# Altium PCB PC110.PcbDoc (part 1 of 24)
Units mm, origin at the board's own origin, x right, y up, seen from the top; angles counter-clockwise.
Board outline 150.05 x 107.35 mm, 10 copper layers (In2.Cu, F.Cu, B.Cu, In1.Cu, In3.Cu, In4.Cu, In5.Cu, In6.Cu, In7.Cu, In8.Cu); 936 components, 1434 nets, 4891 pads, 6088 vias.
Unrouted connection lines stored in the file: 2995.
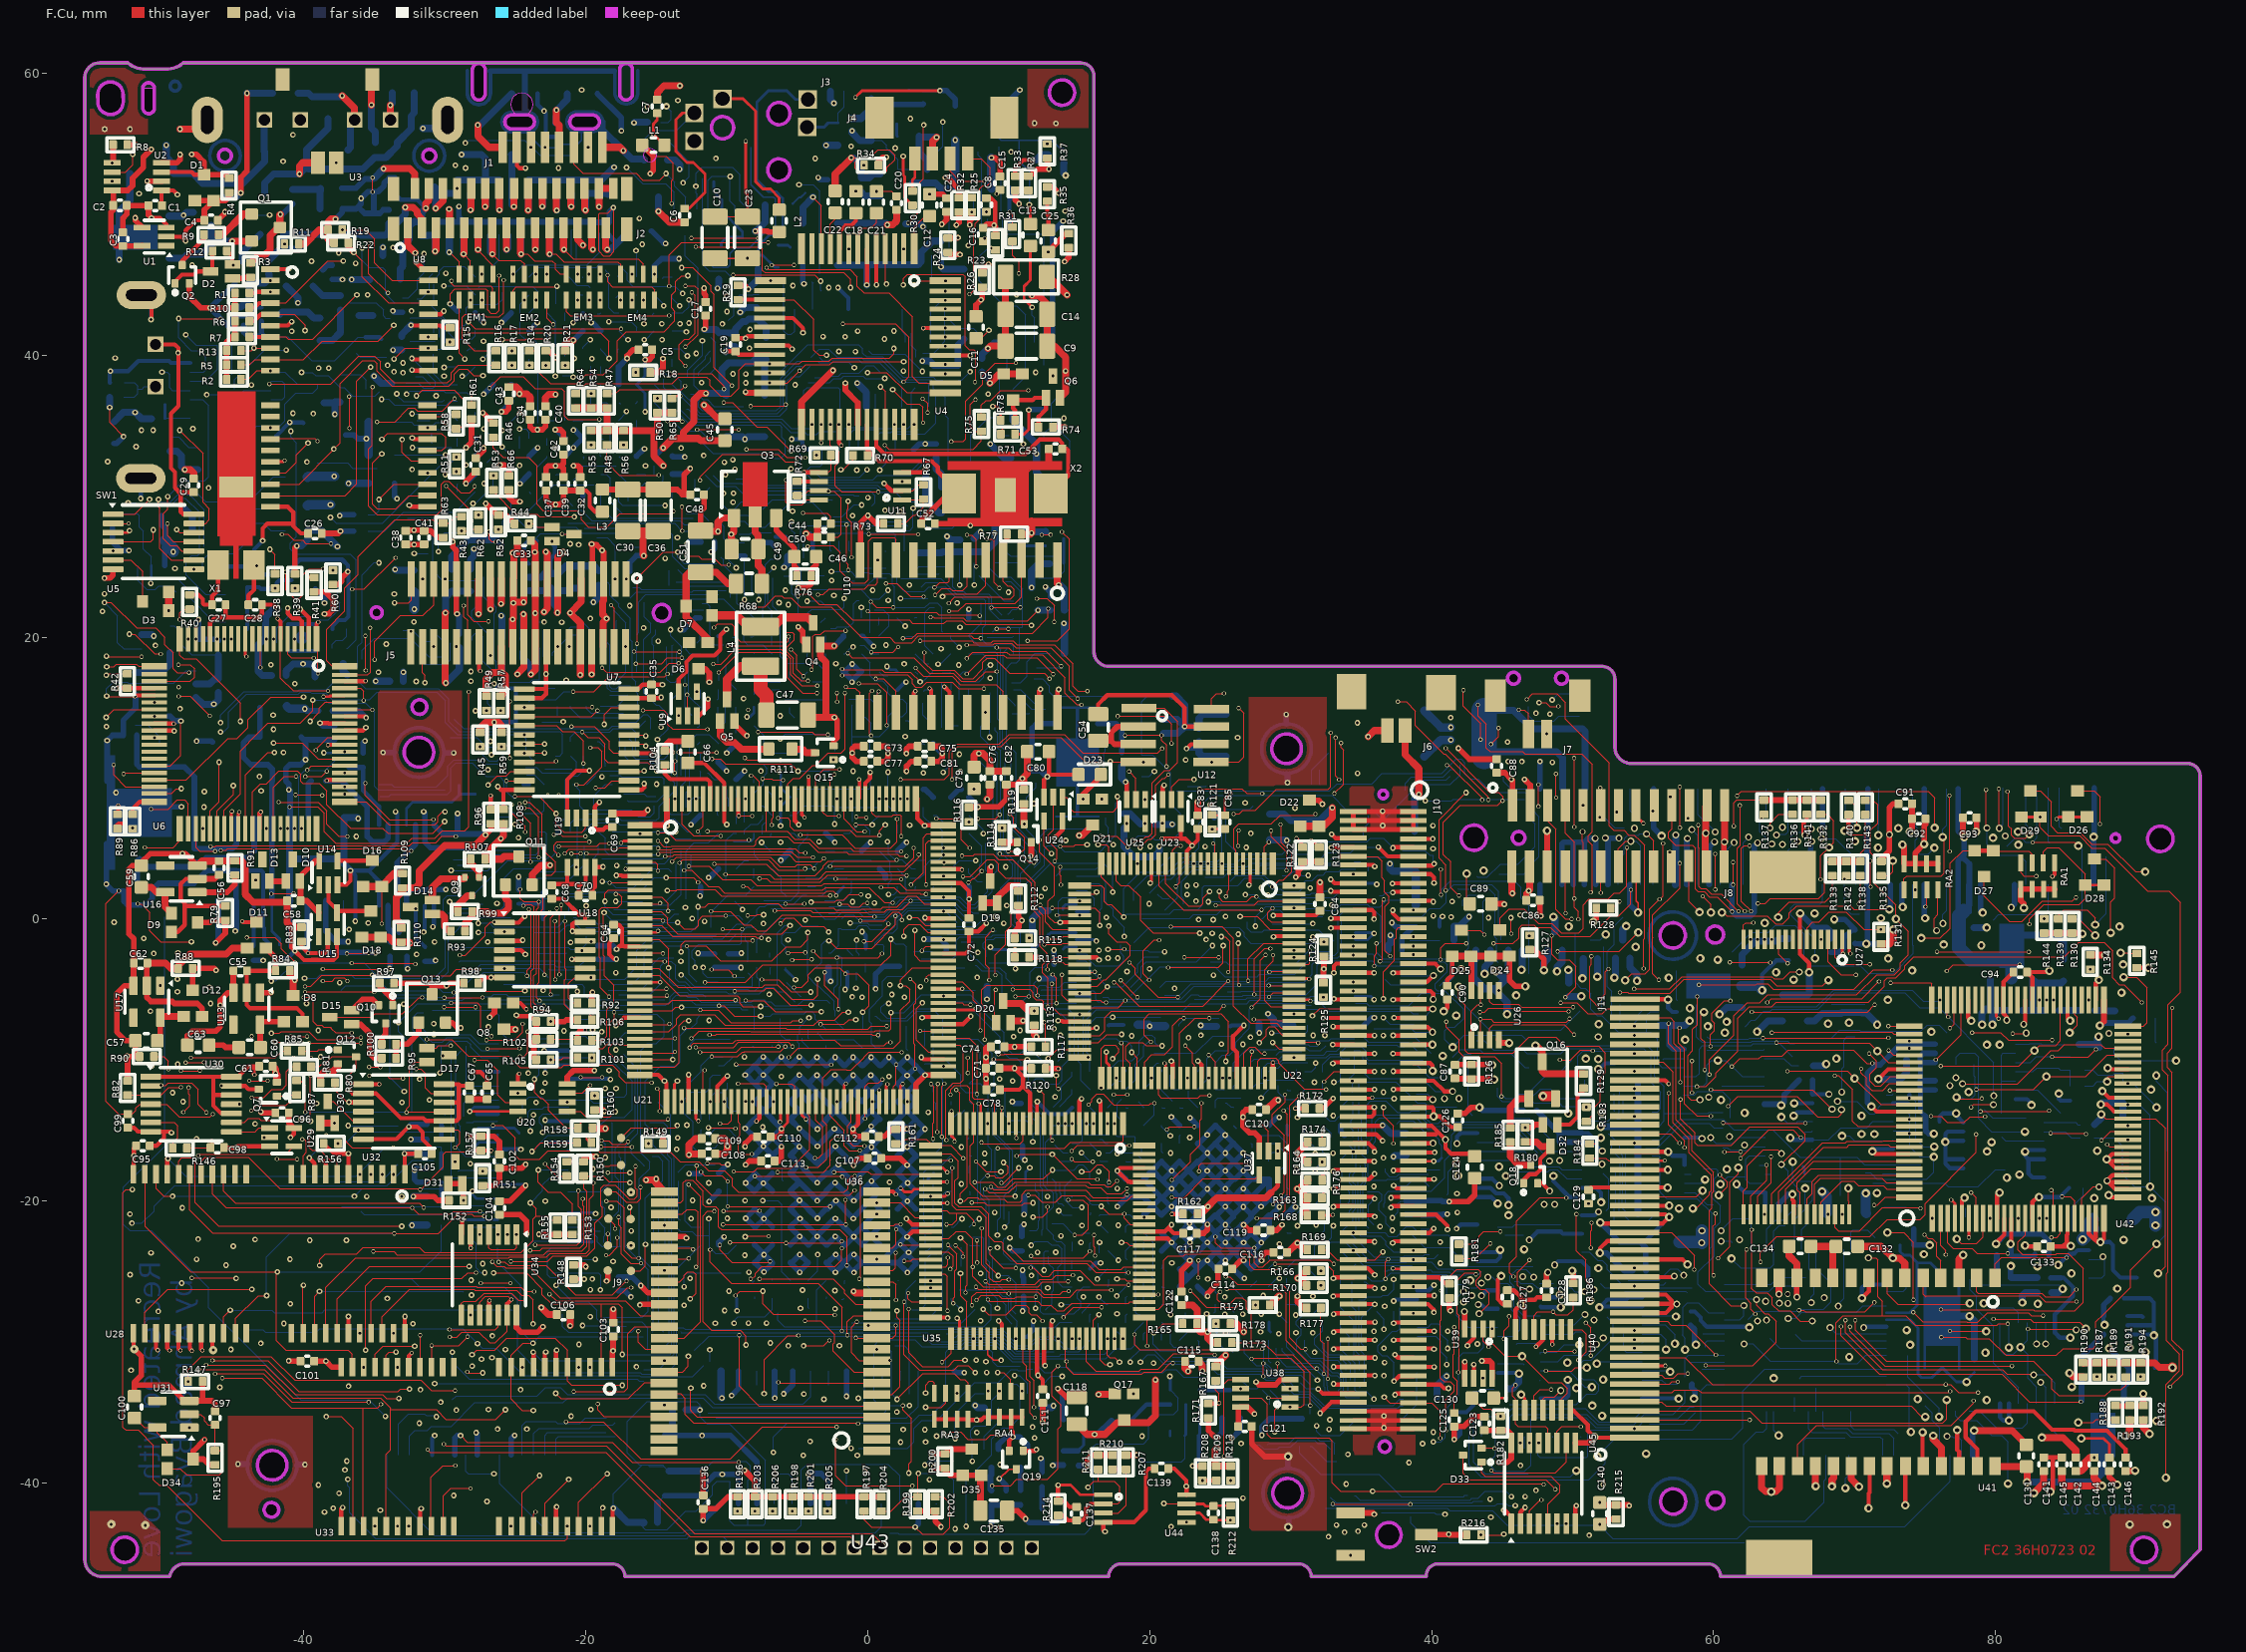
[diagram p0: F.Cu view]
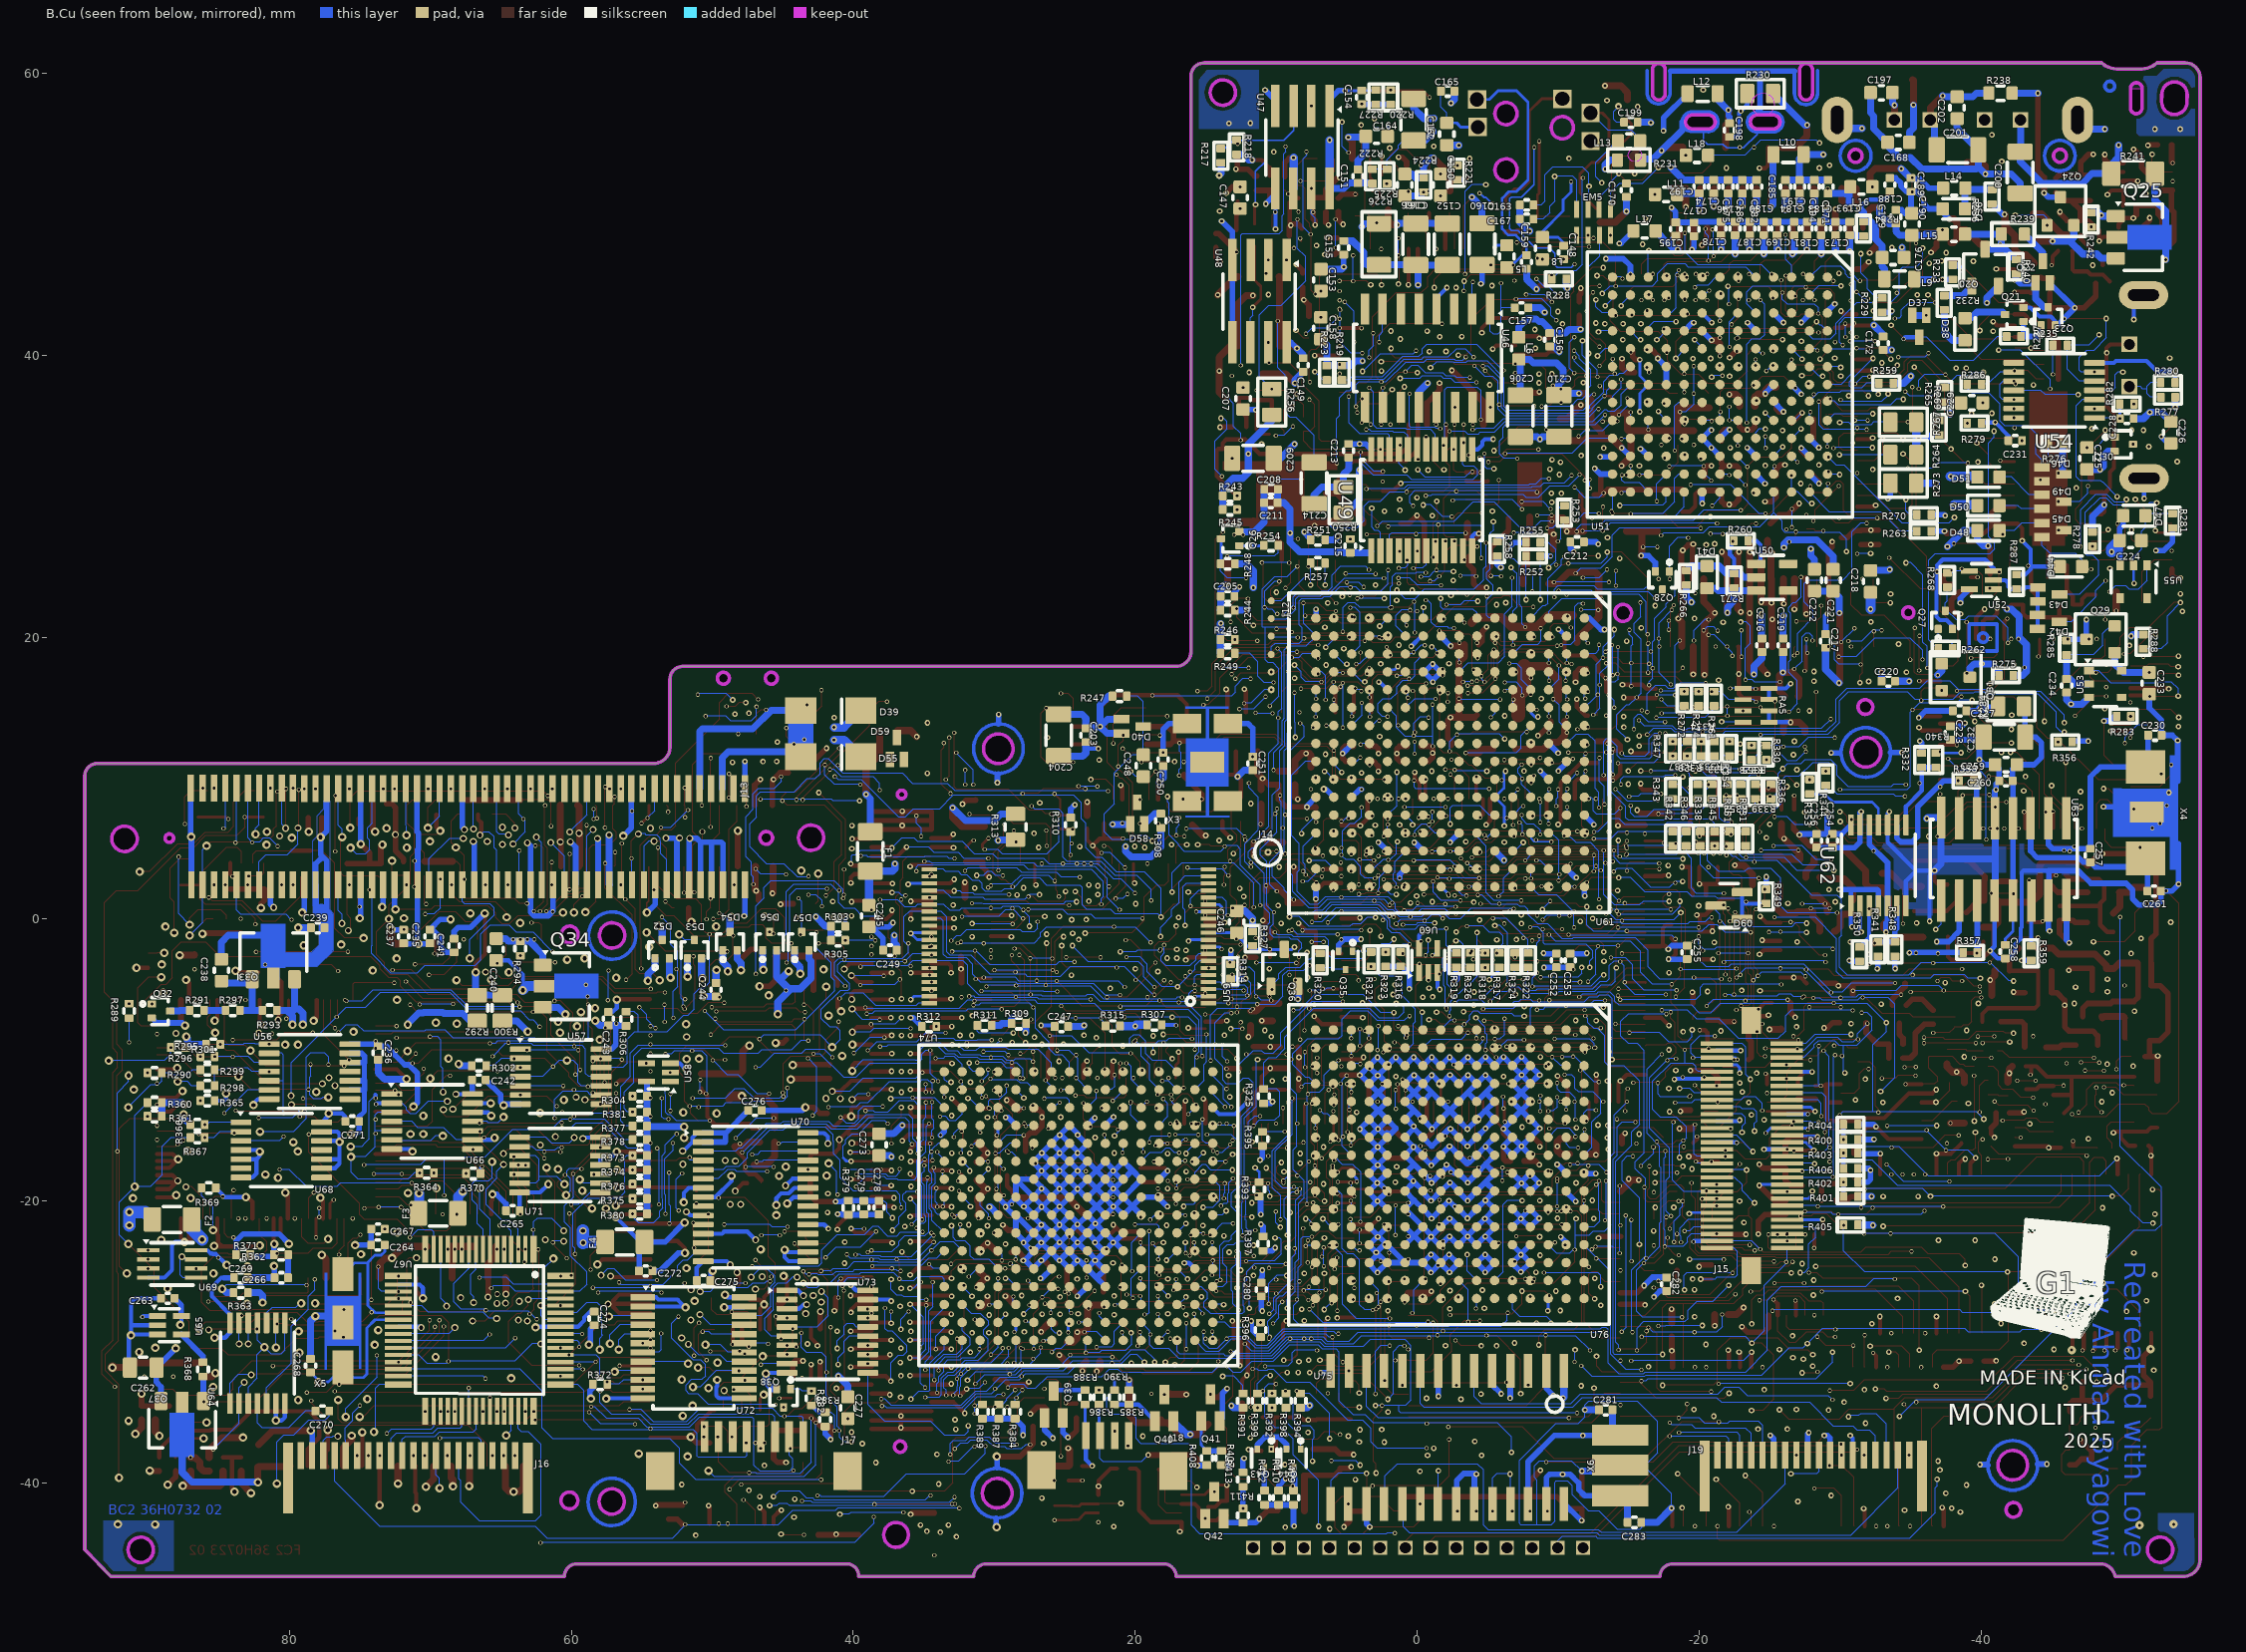
[diagram p1: B.Cu view, seen from below]
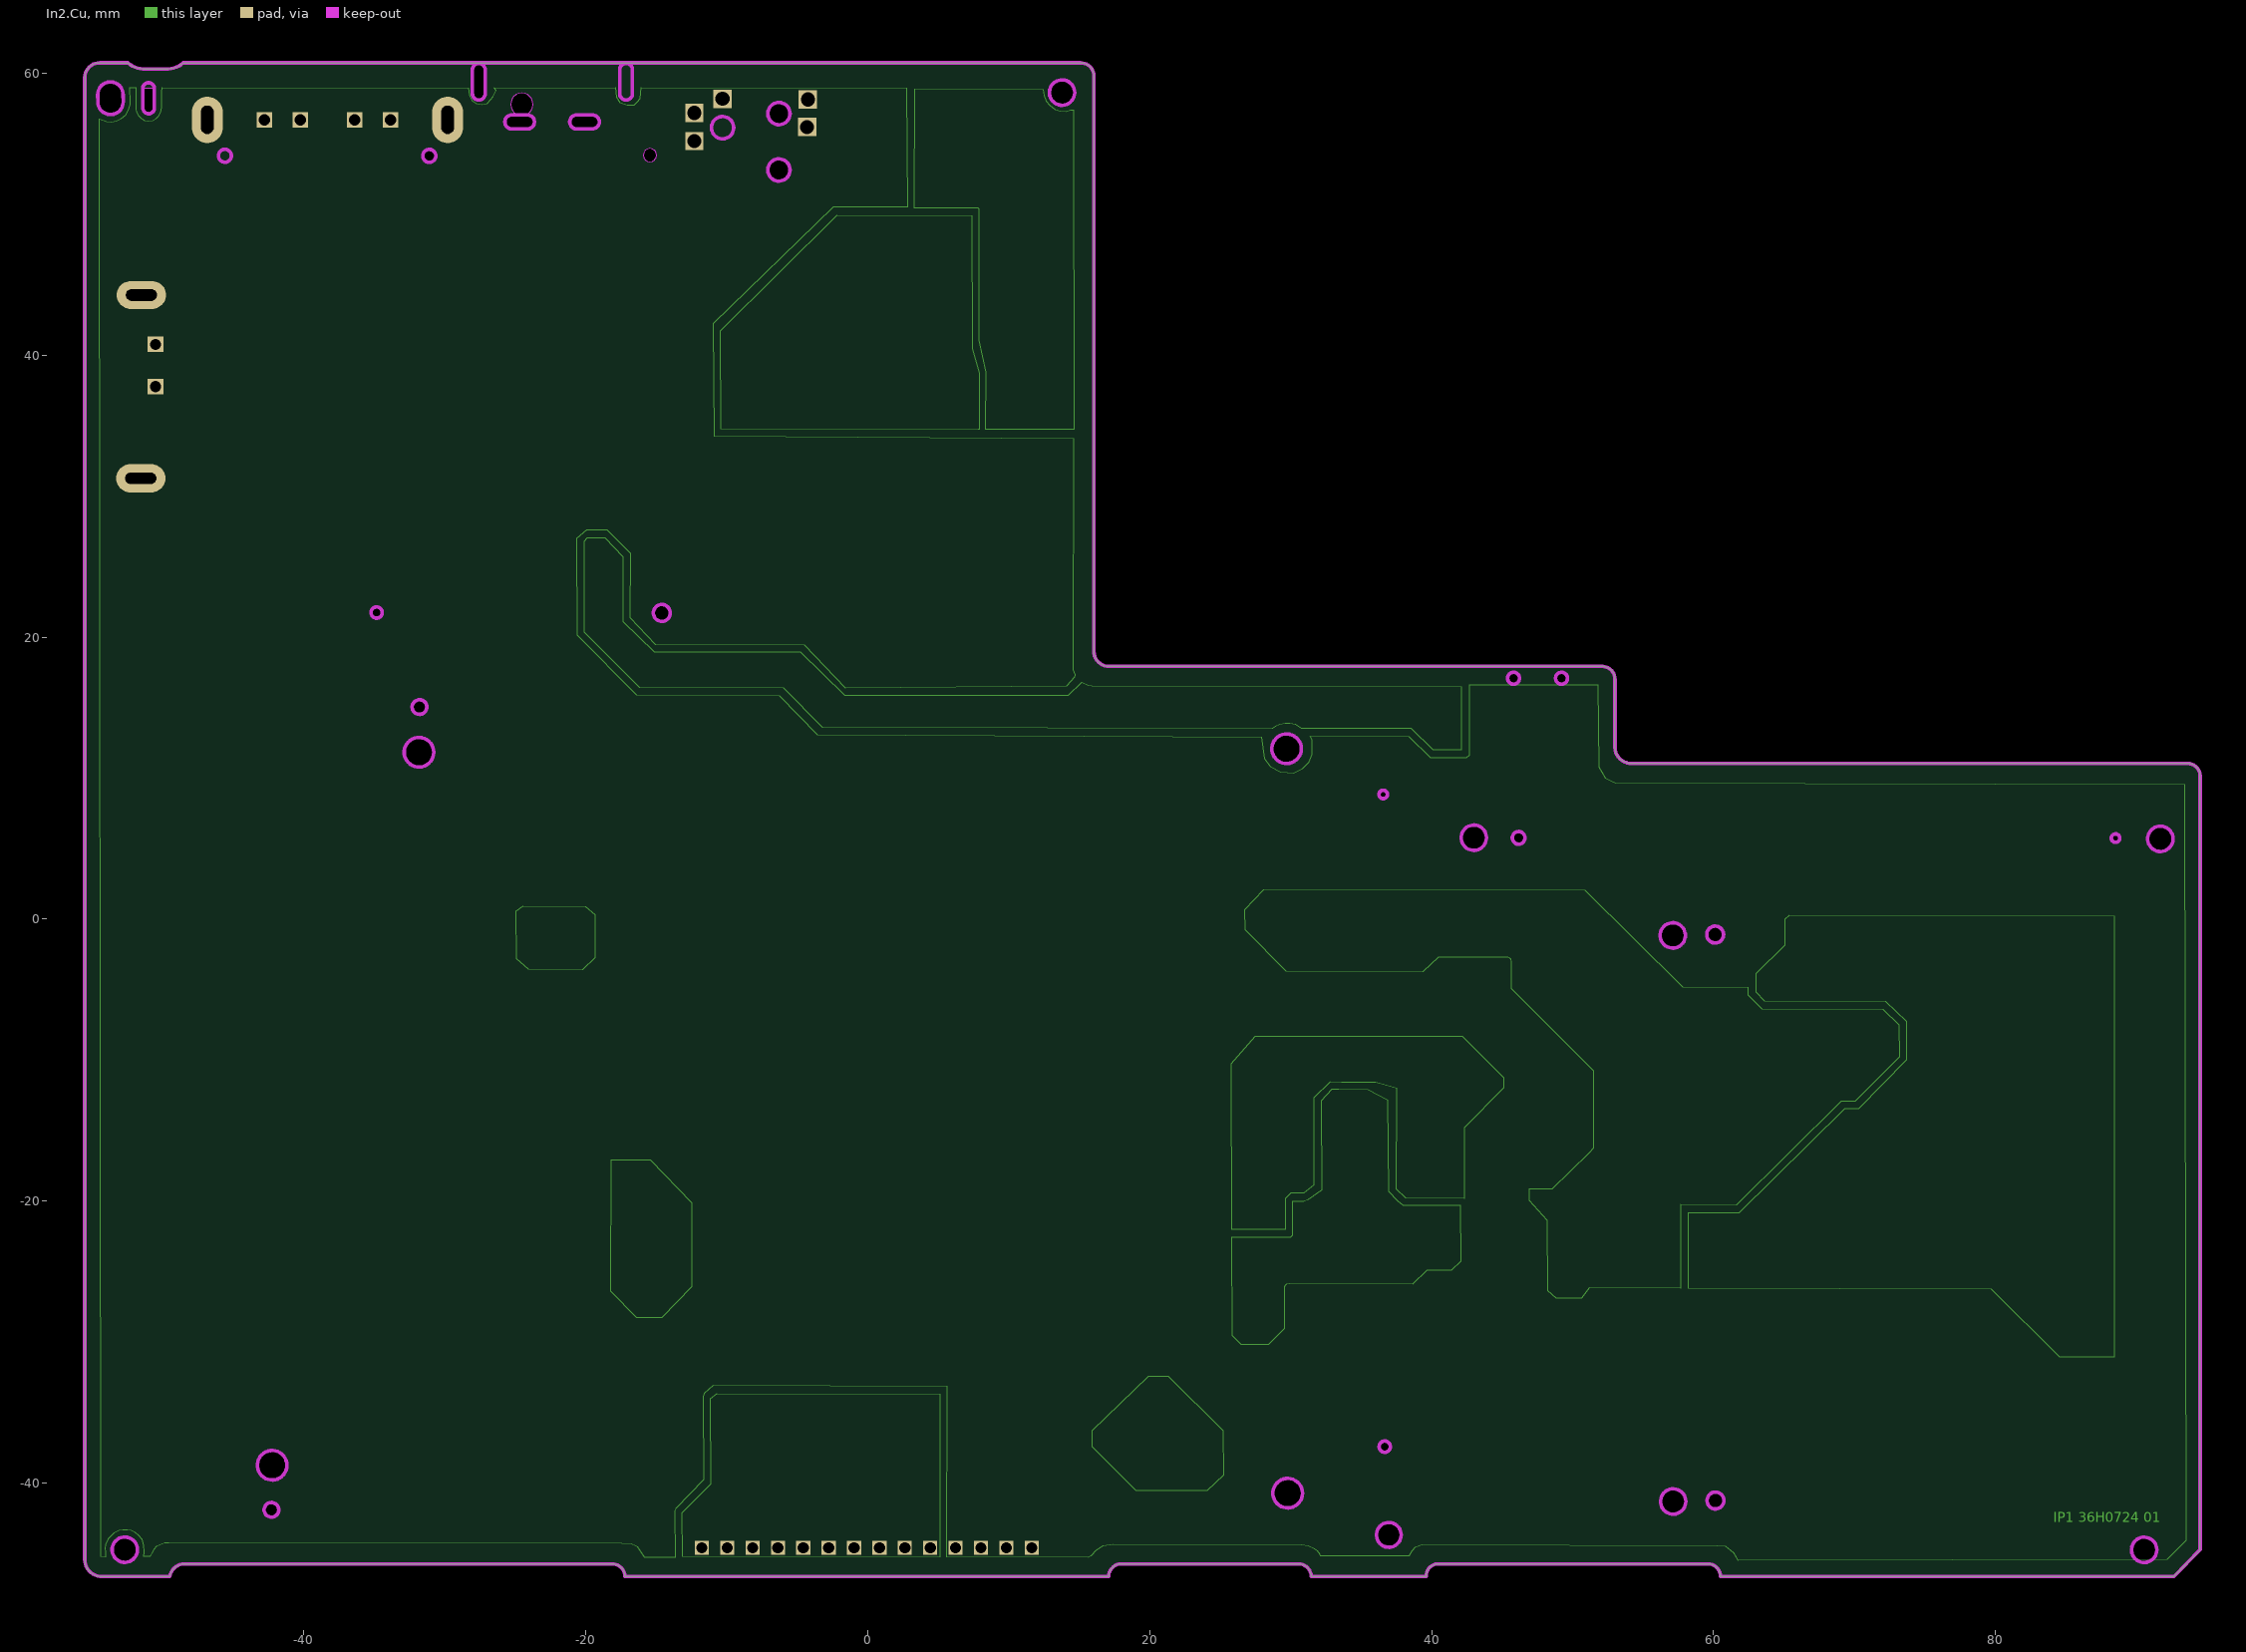
[diagram p2: In2.Cu]
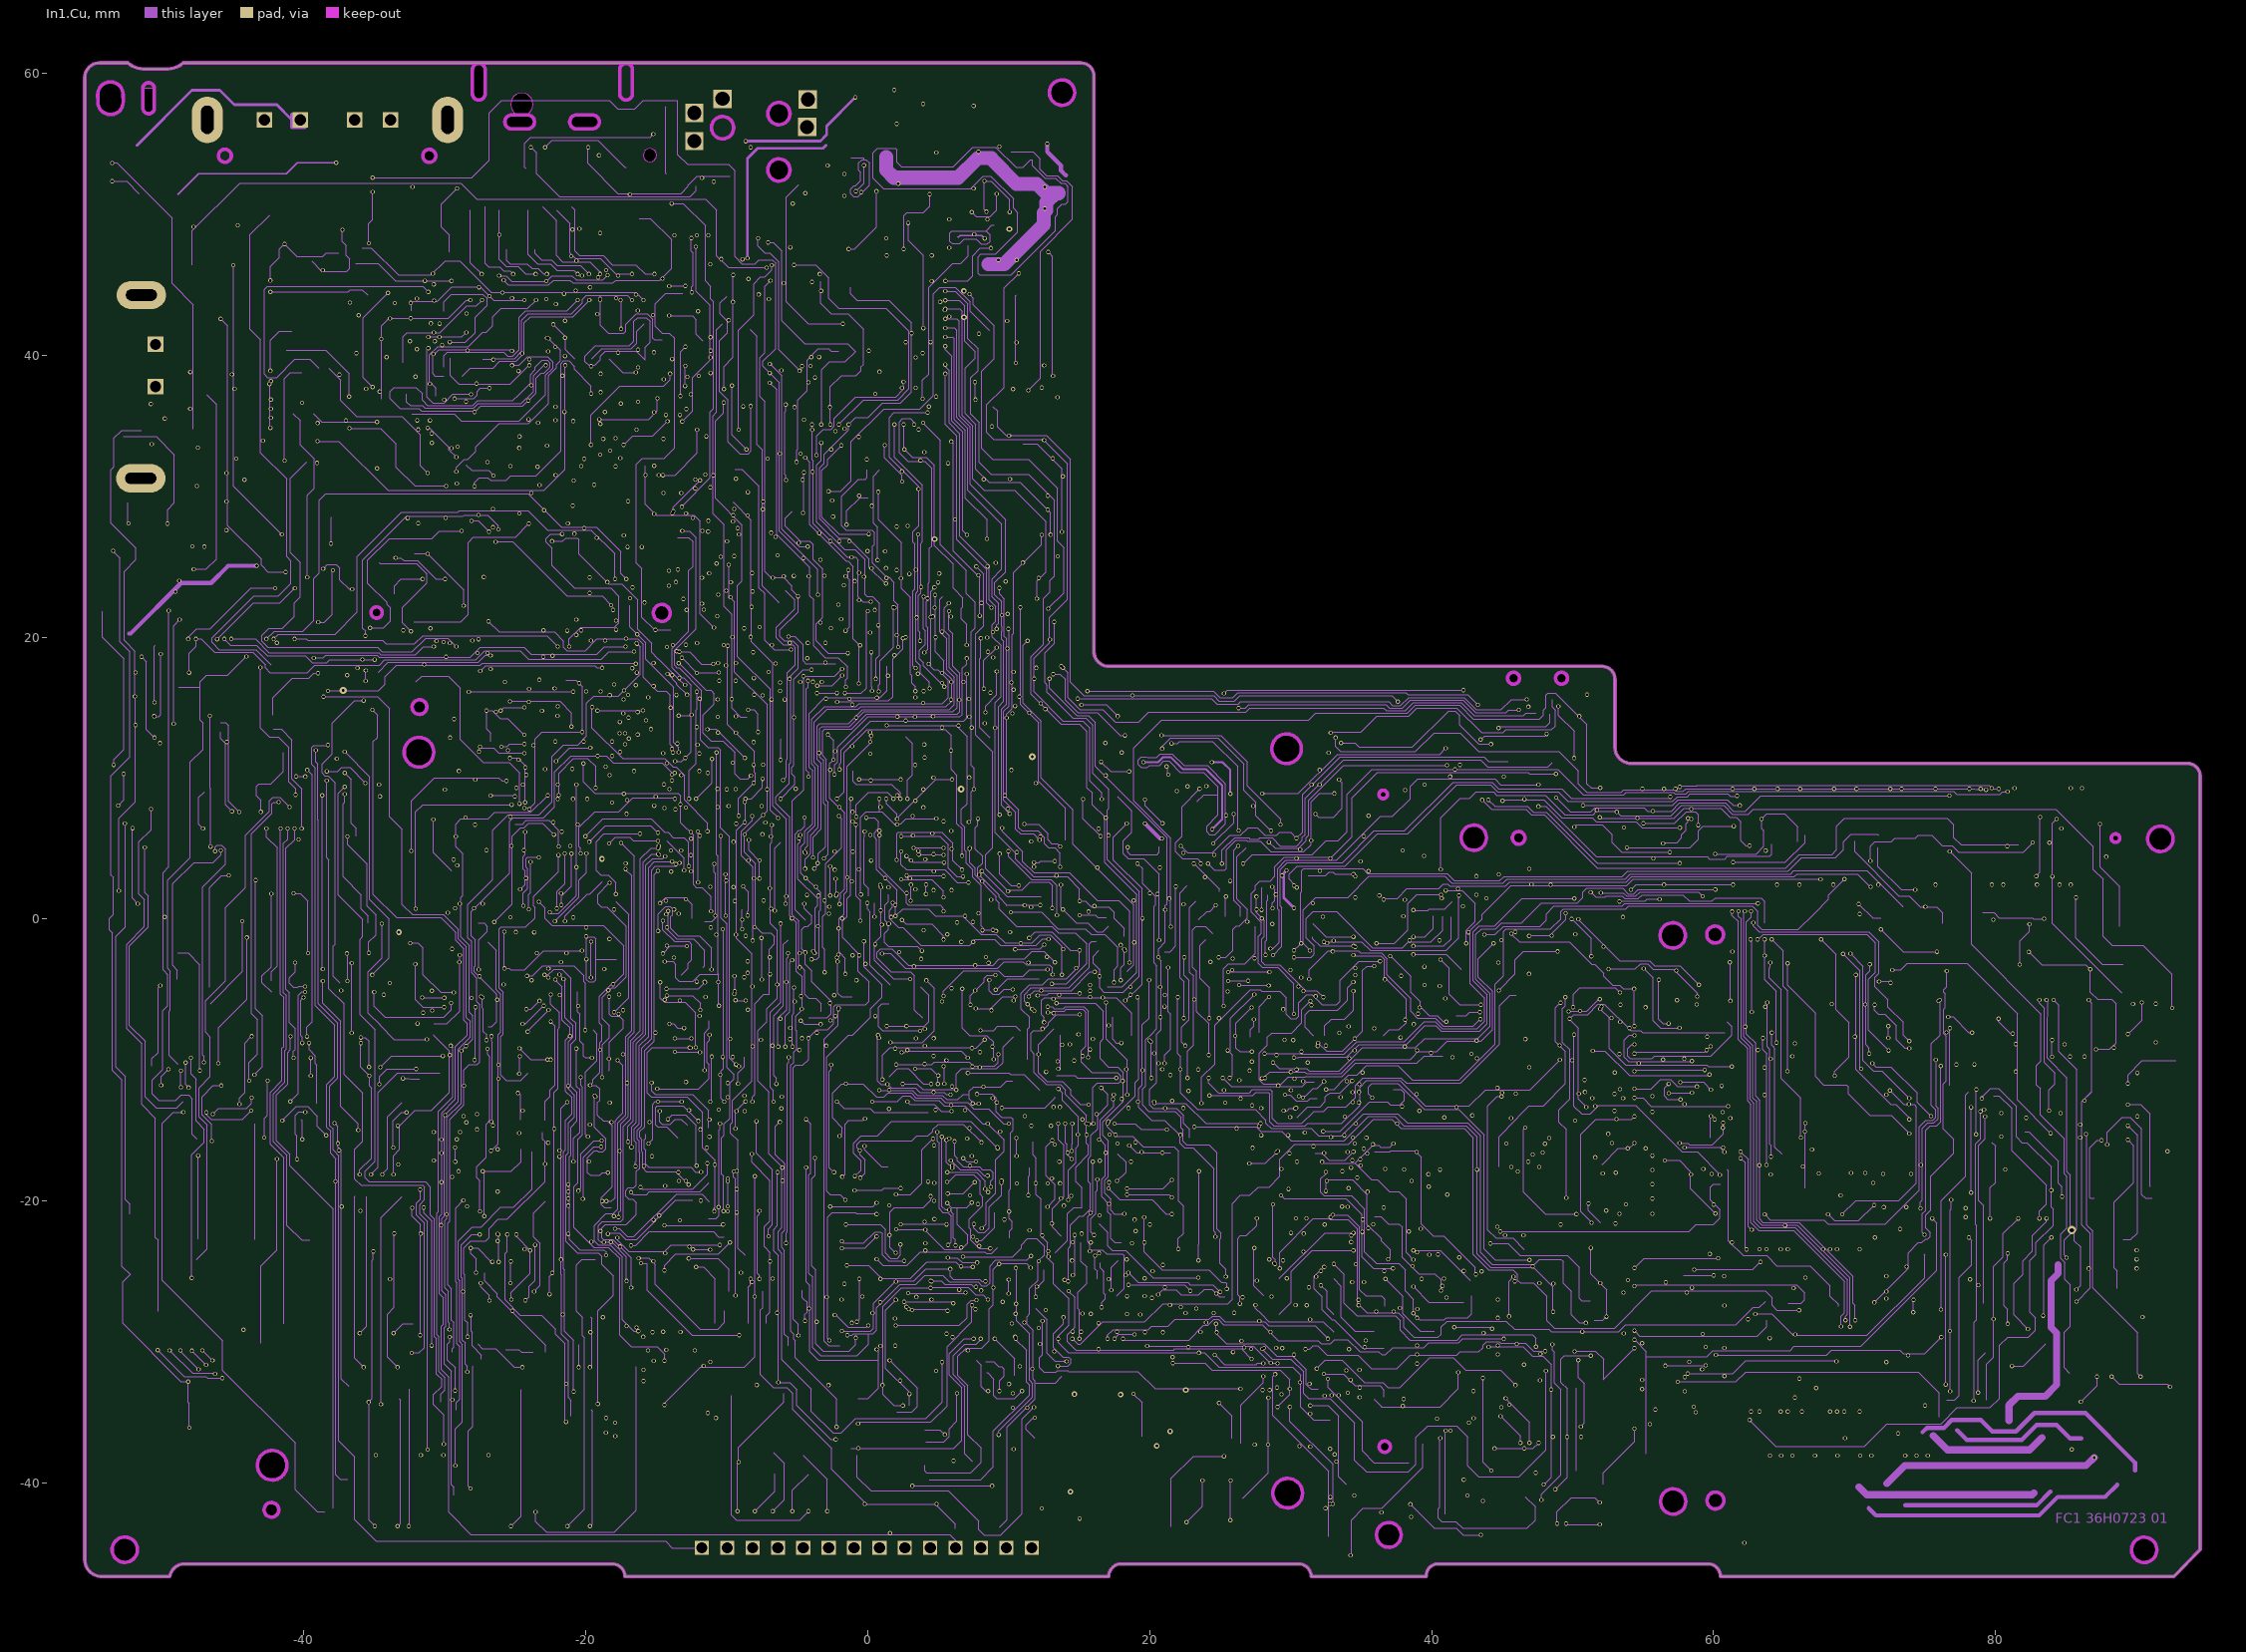
[diagram p3: In1.Cu]
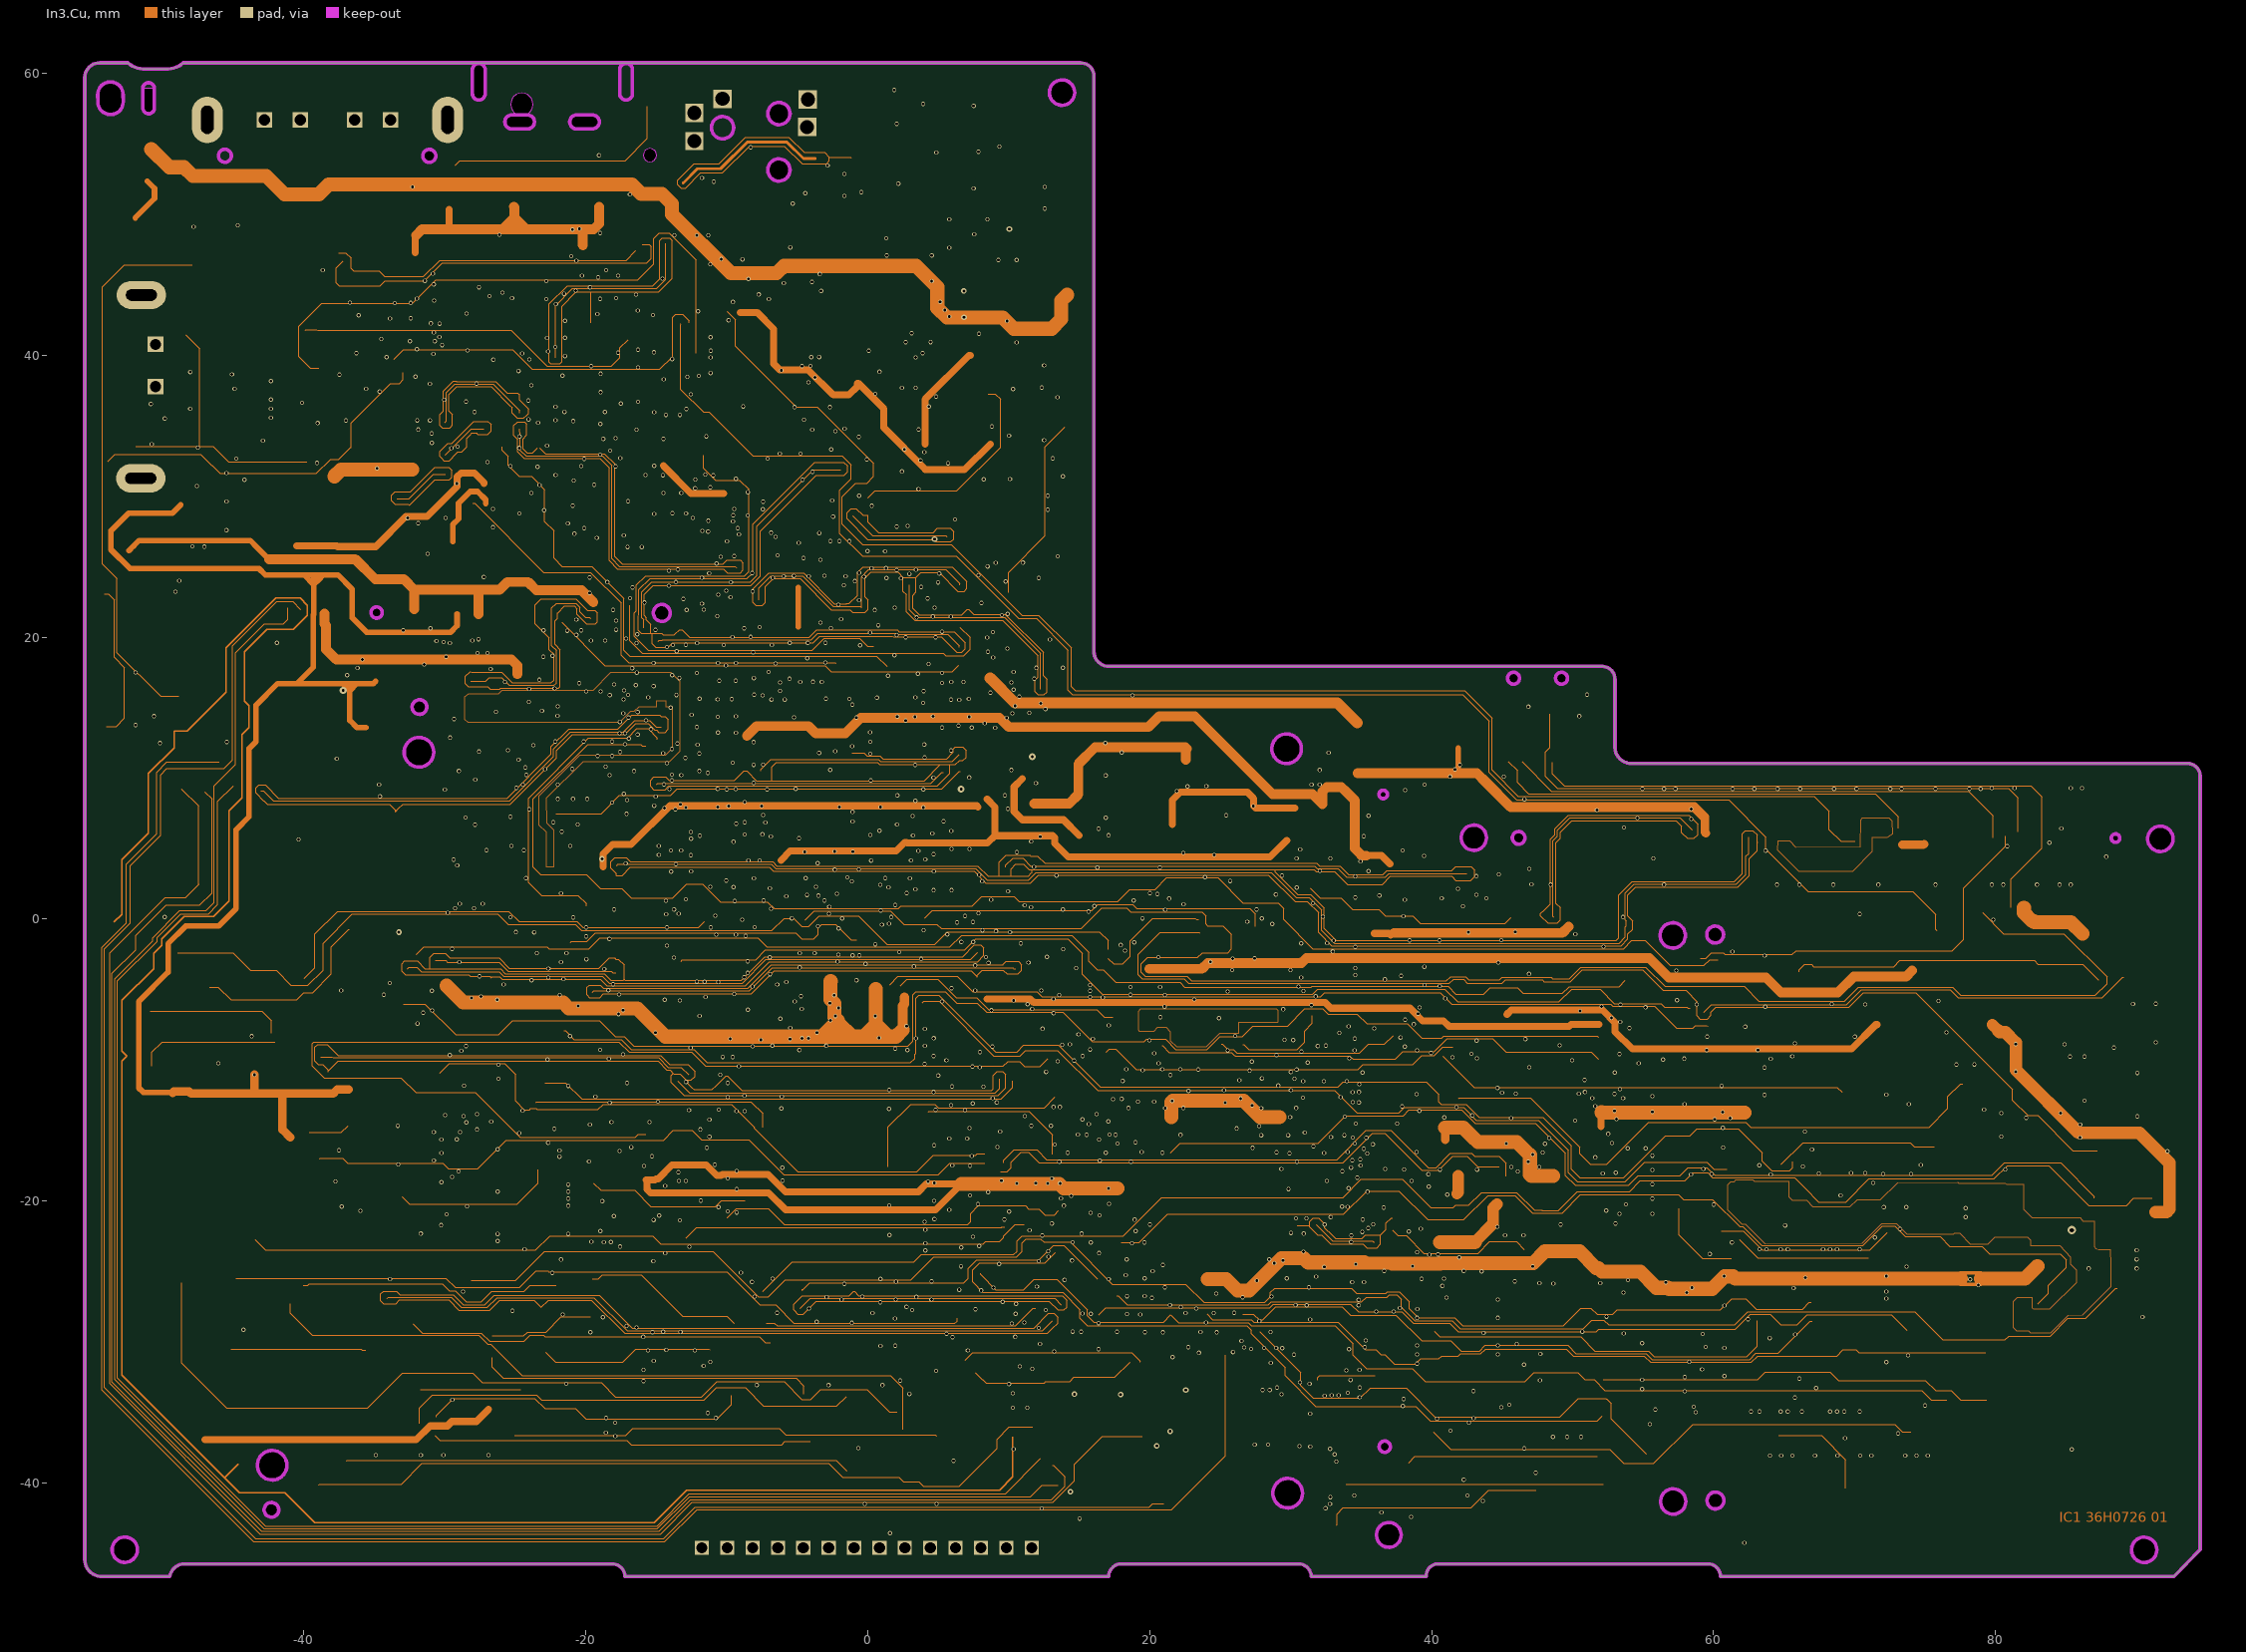
[diagram p4: In3.Cu]
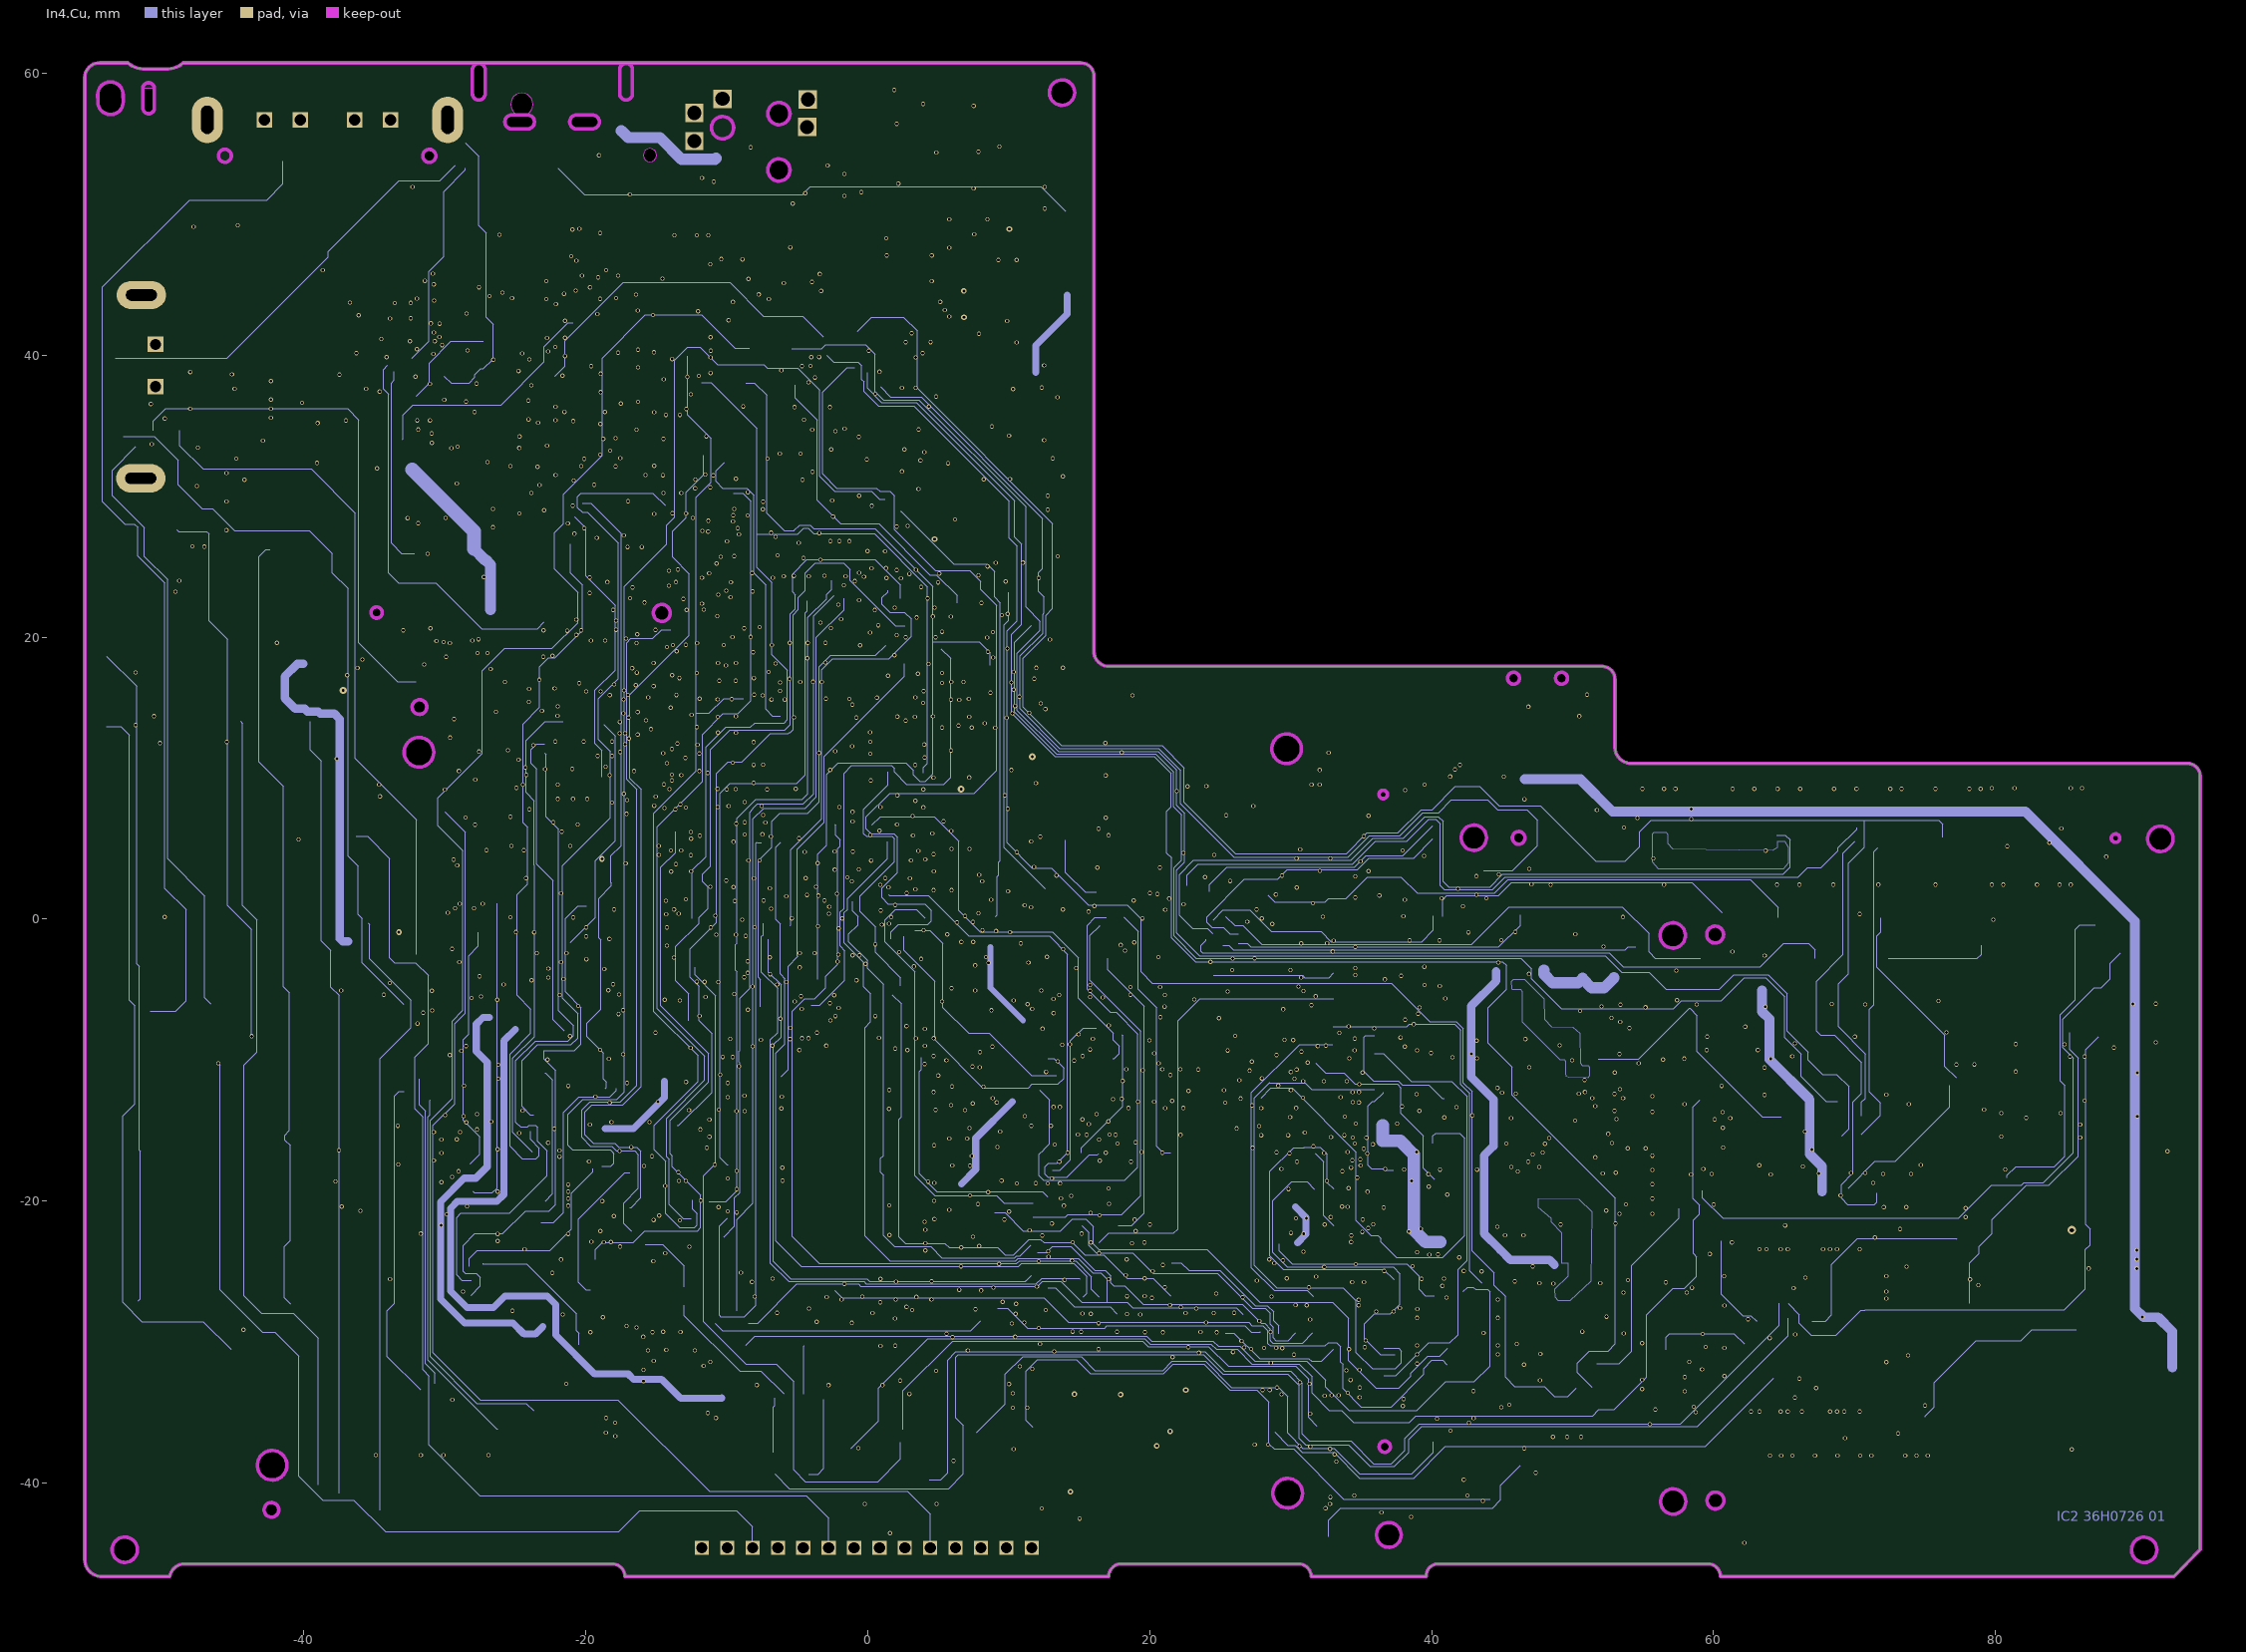
[diagram p5: In4.Cu]
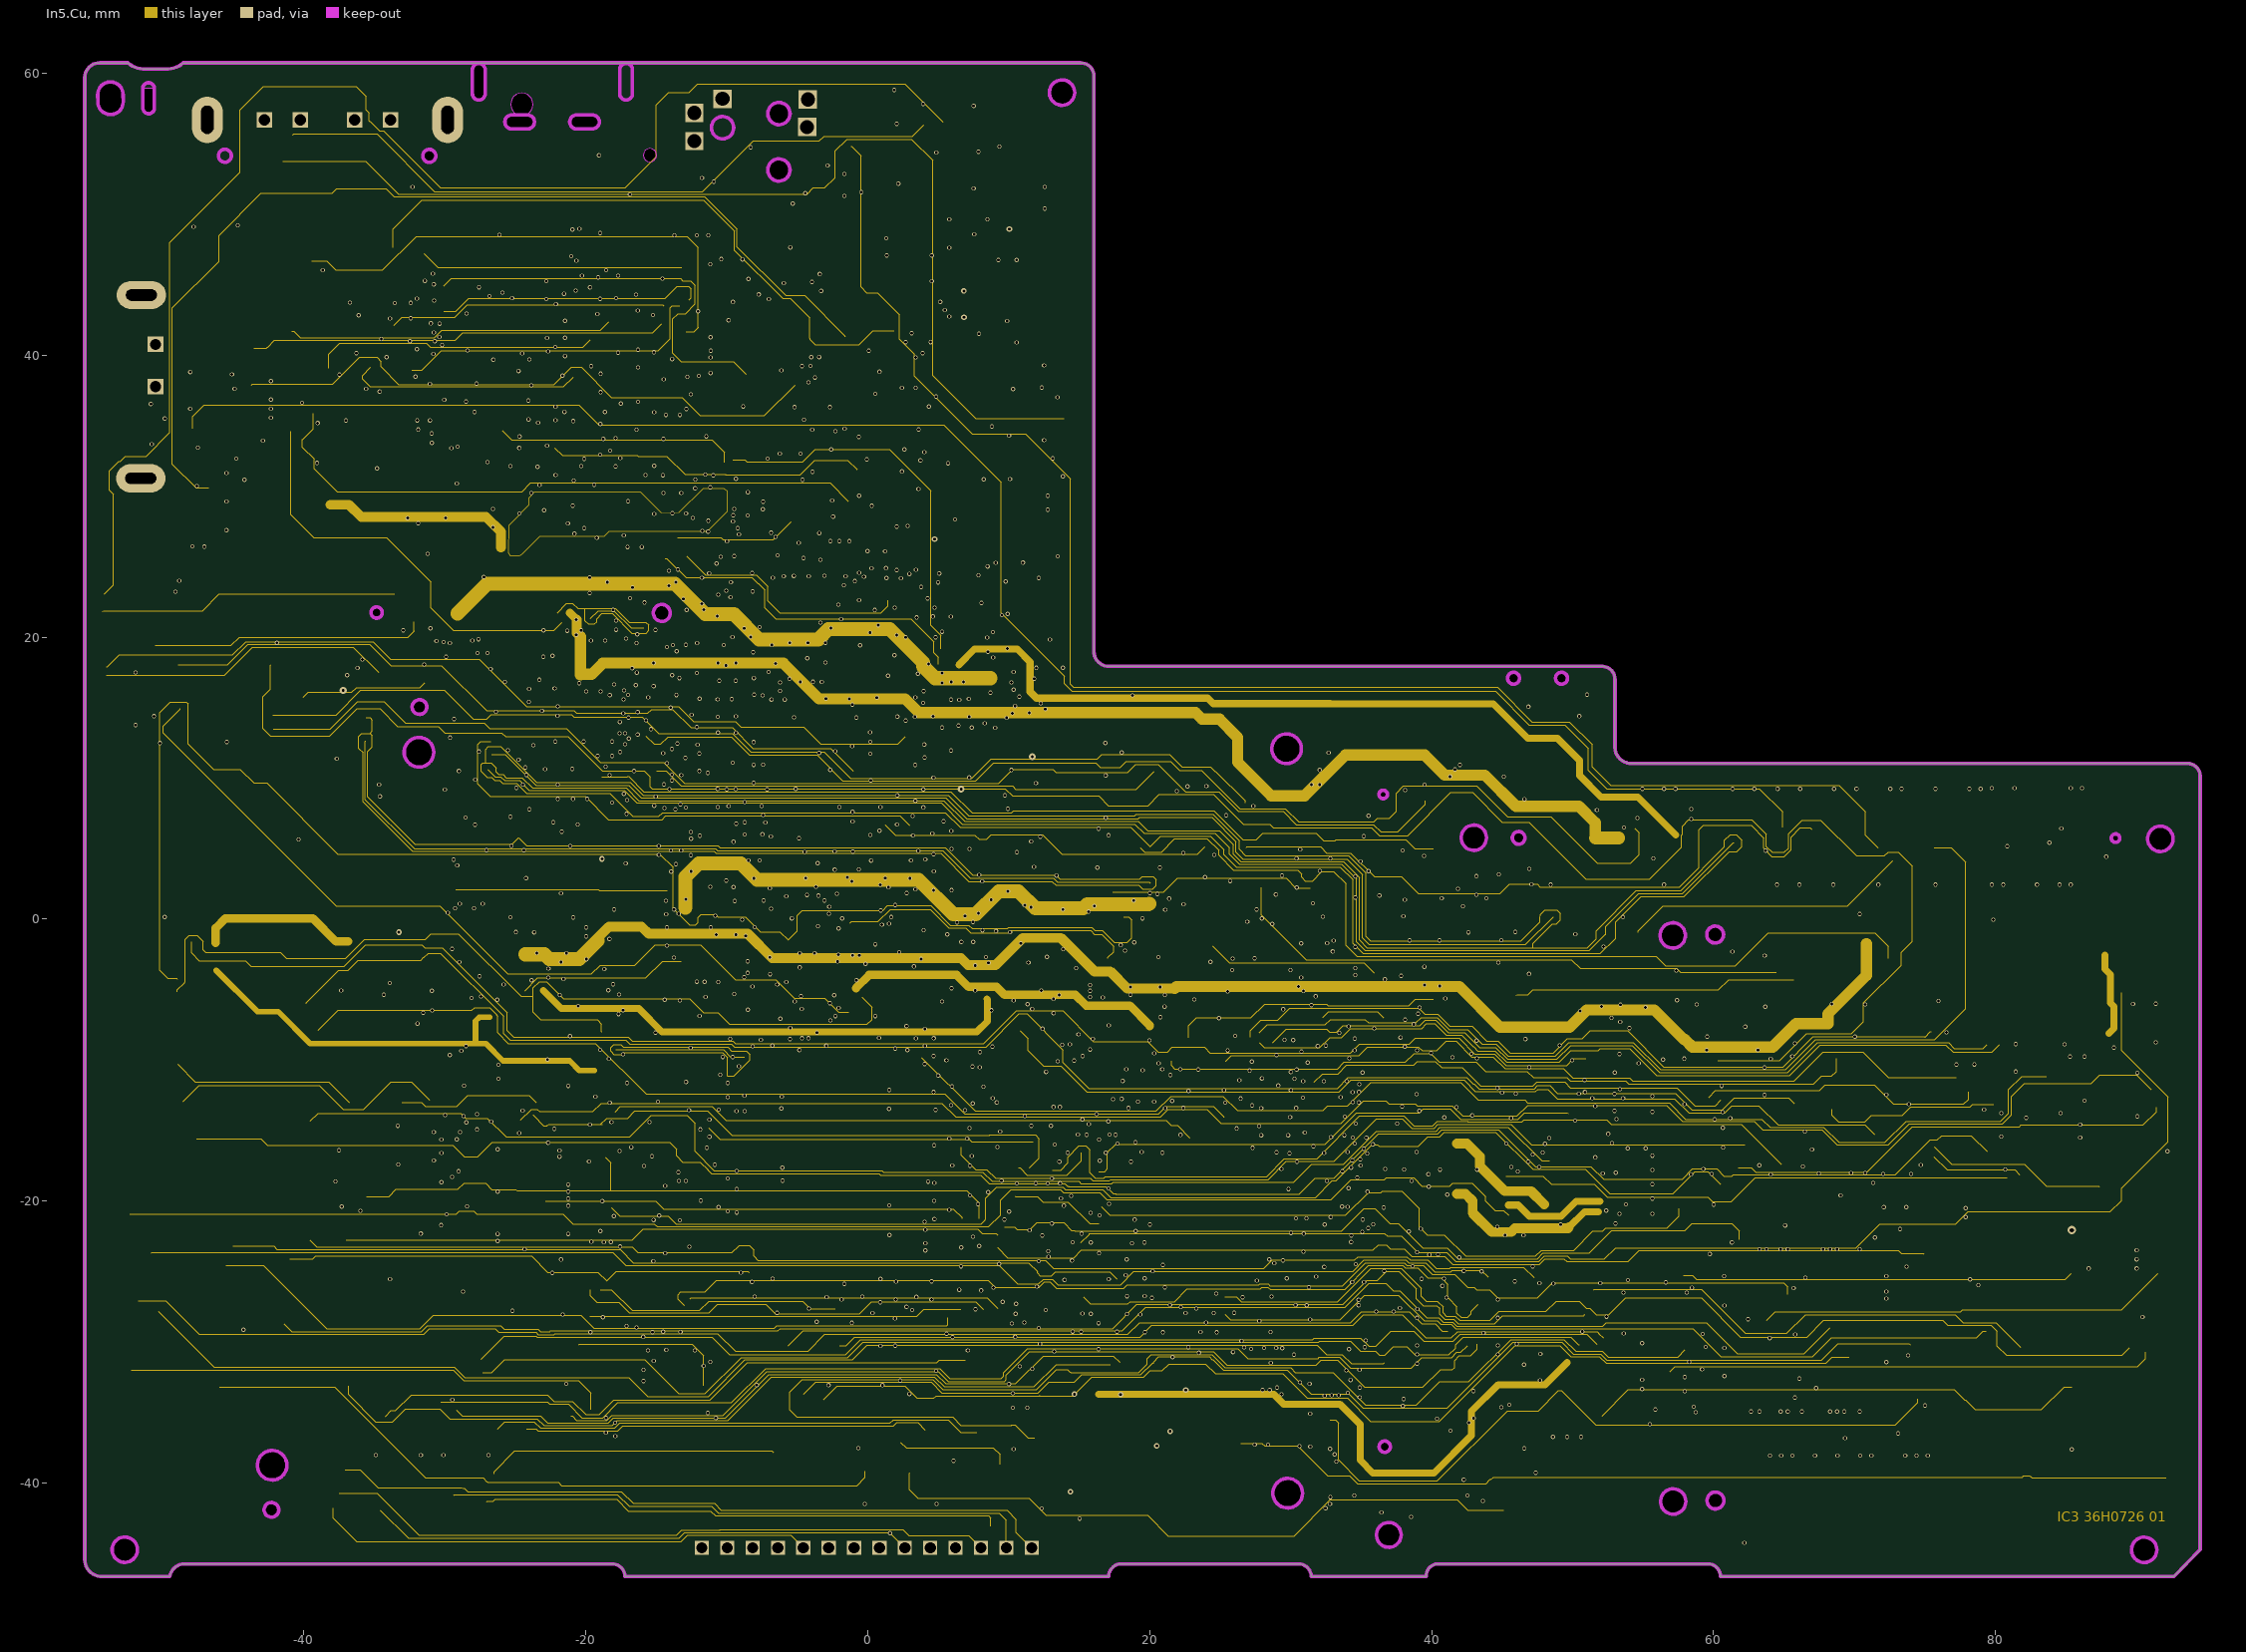
[diagram p6: In5.Cu]
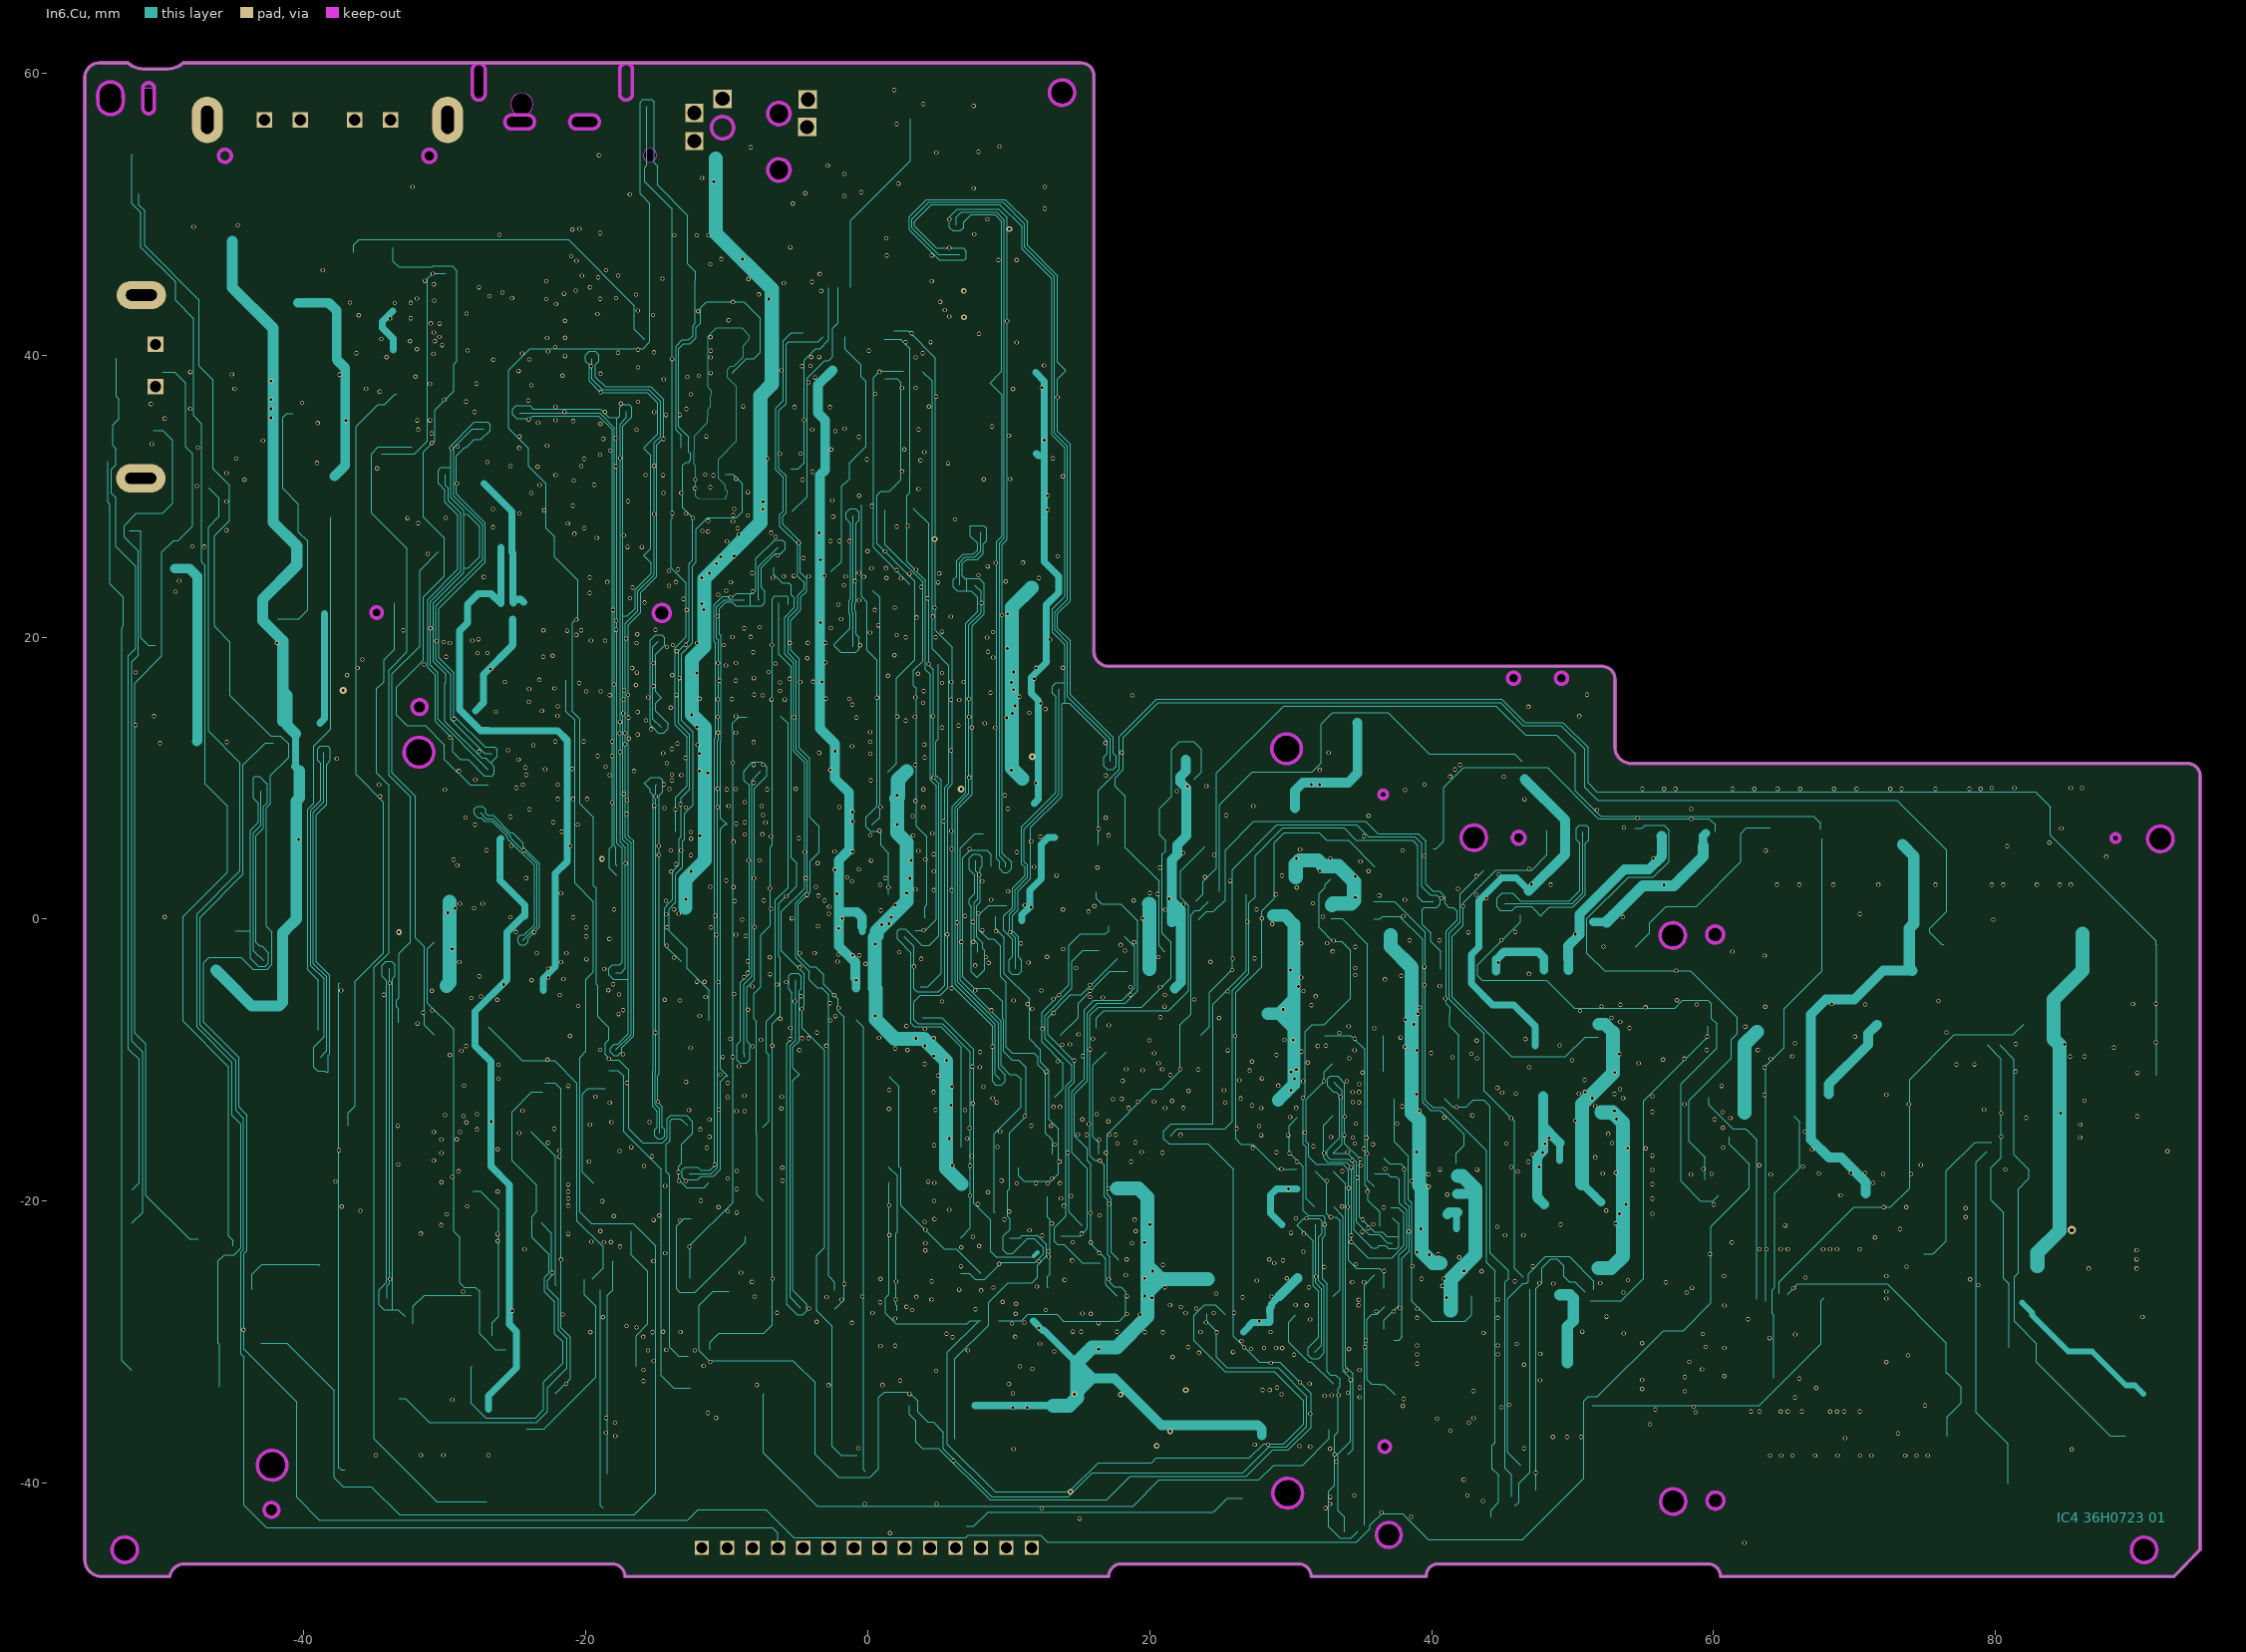
[diagram p7: In6.Cu]
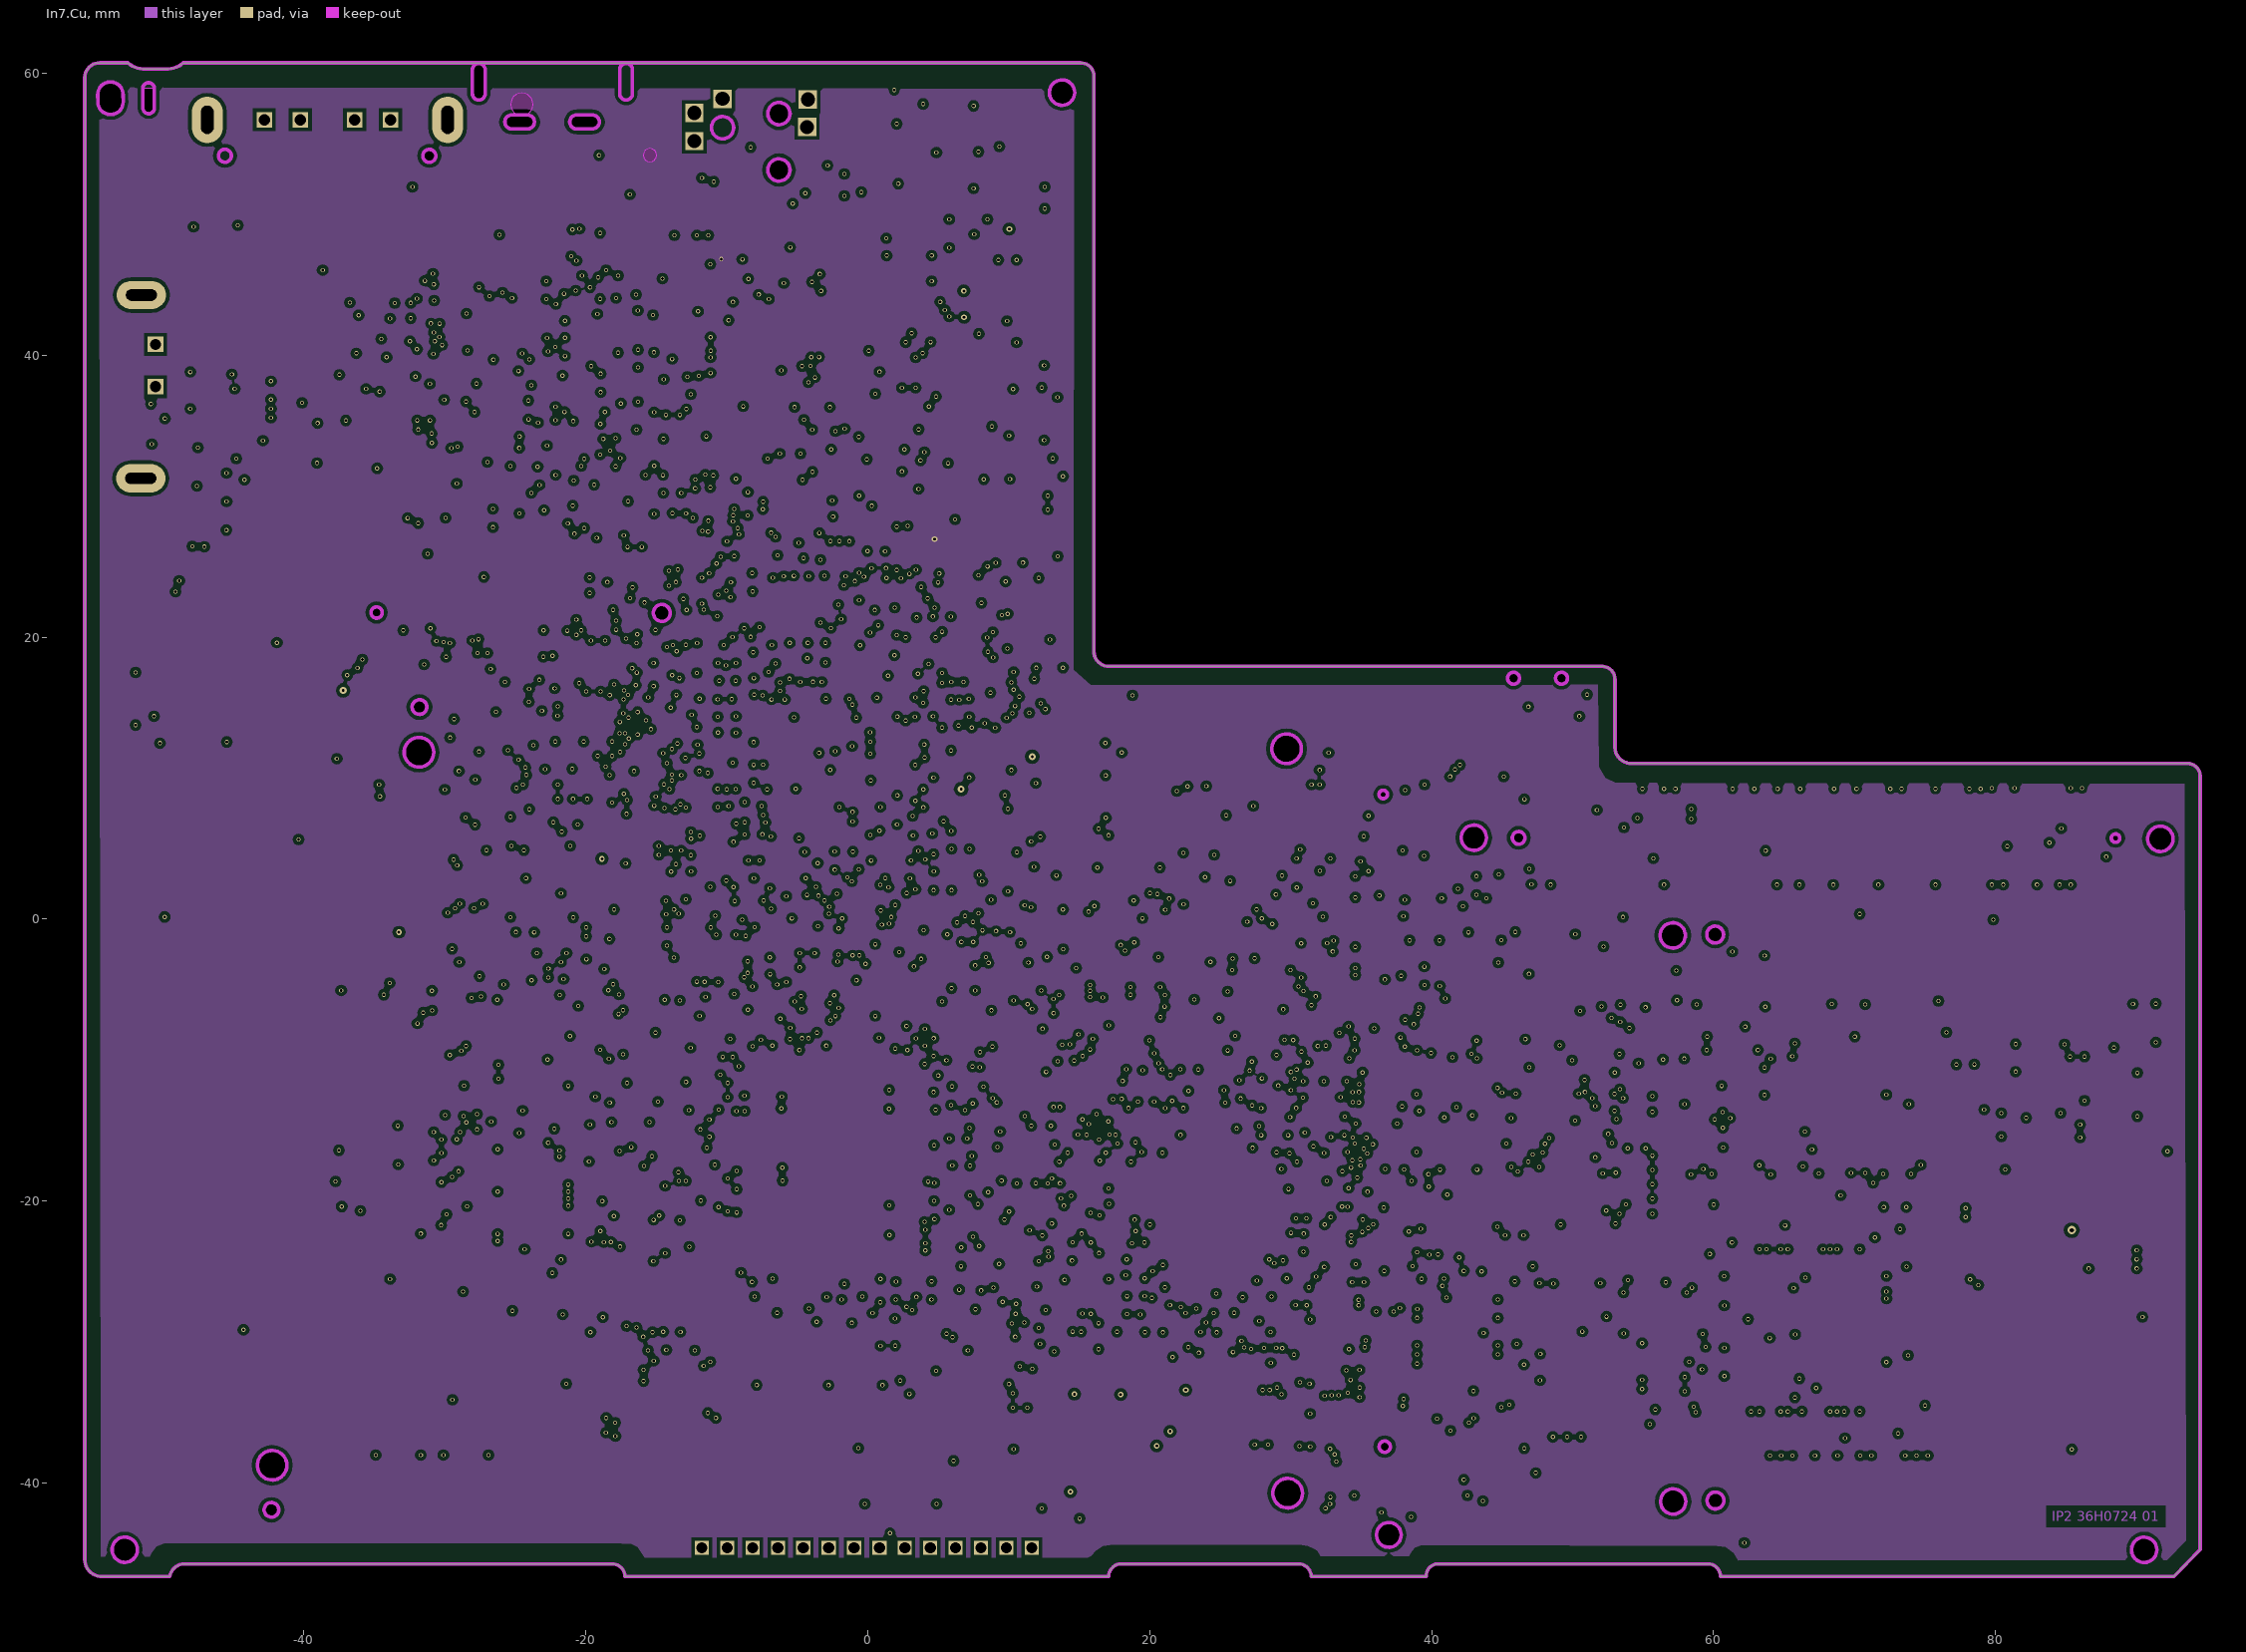
[diagram p8: In7.Cu]
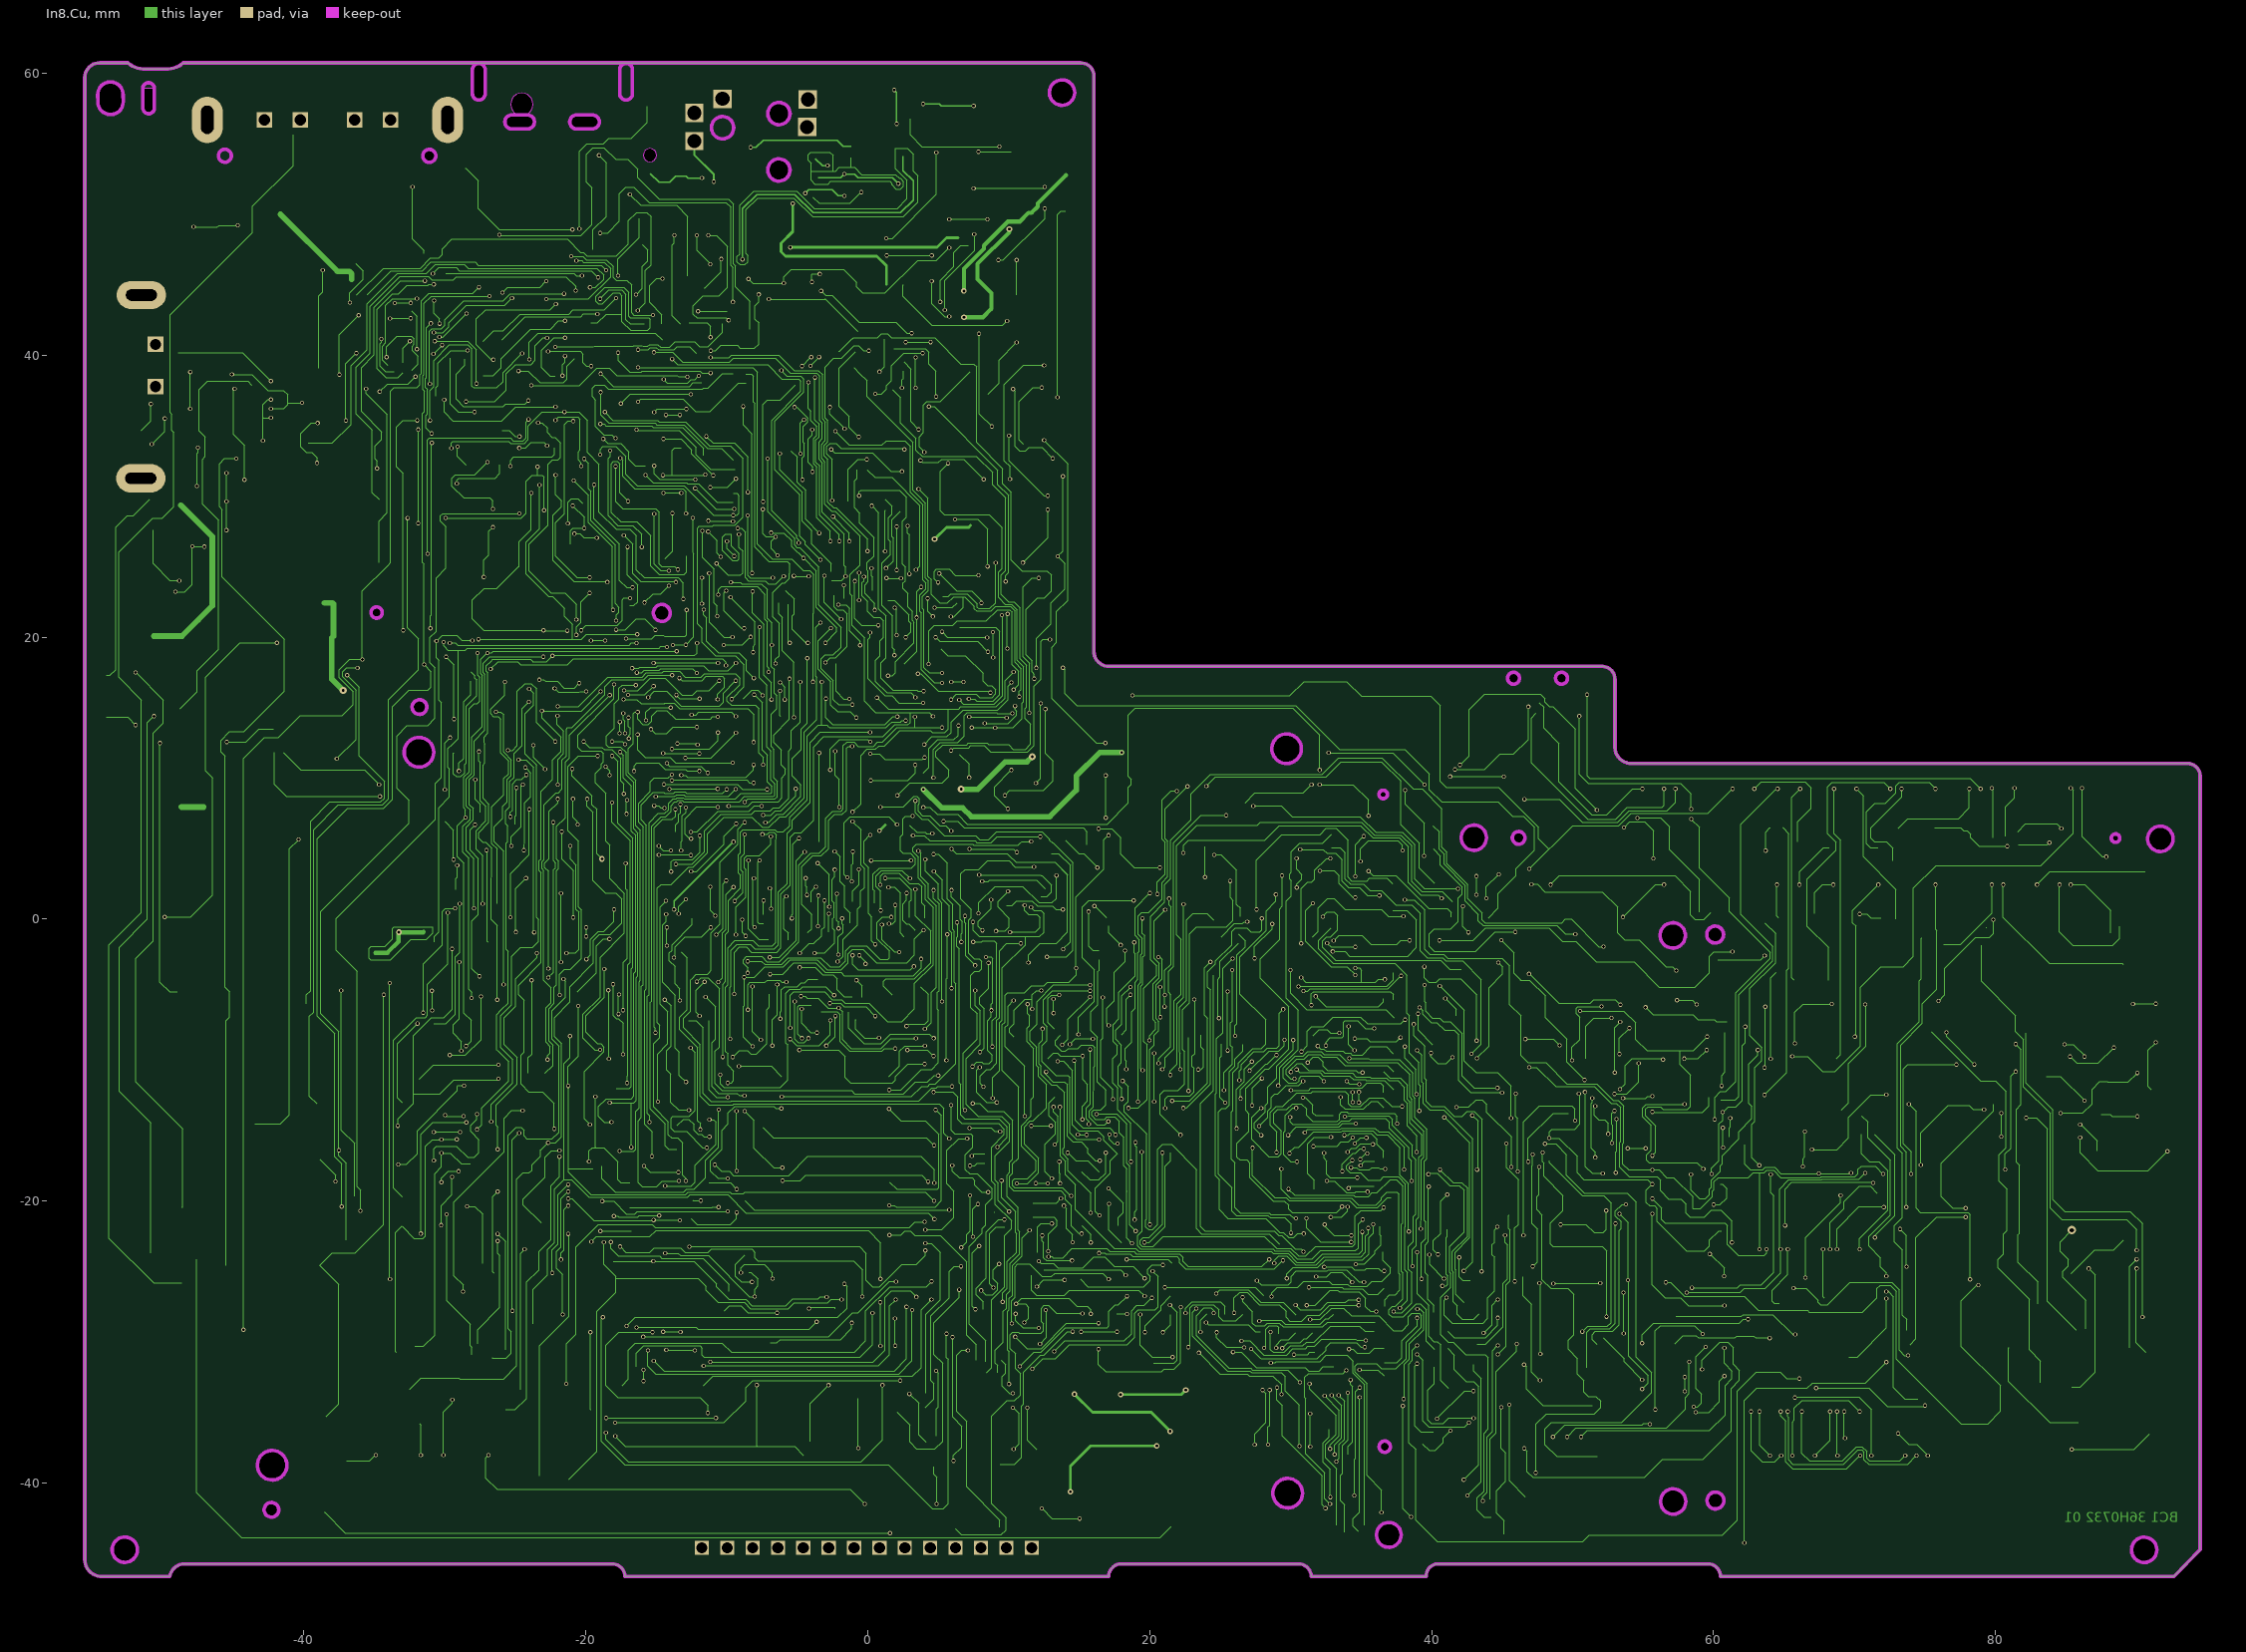
[diagram p9: In8.Cu]

## Layer stack, top to bottom
In2.Cu: signal copper 0.0356
Dielectric3: dielectric 0.32, FR-4, Dk 4.8
F.Mask: solder mask 0.0102, Solder Resist, Dk 3.5
F.Cu: signal copper 0.0356
Dielectric 1: dielectric 0.32, FR-4, Dk 4.8
B.Cu: signal copper 0.0356
B.Mask: solder mask 0.0102, Solder Resist, Dk 3.5
In1.Cu: signal copper 0.0356
Dielectric2: dielectric 0.32, FR-4, Dk 4.8
In3.Cu: signal copper 0.0356
Dielectric4: dielectric 0.32, FR-4, Dk 4.8
In4.Cu: signal copper 0.0356
Dielectric5: dielectric 0.32, FR-4, Dk 4.8
In5.Cu: signal copper 0.0356
Dielectric6: dielectric 0.32, FR-4, Dk 4.8
In6.Cu: signal copper 0.0356
Dielectric7: dielectric 0.32, FR-4, Dk 4.8
In7.Cu: signal copper 0.0356
Dielectric8: dielectric 0.32, FR-4, Dk 4.8
In8.Cu: signal copper 0.0356
Dielectric9: dielectric 0.32, FR-4, Dk 4.8

## Board outline
94.51,10.18 ccw(c93.62,10.16) 93.65,11.05 54.18,11.05 cw(c54.155,12.205) 53,12.188 53,17.031 ccw(c52.111,17.041) 52.121,17.93 17.116,17.93 cw(c17.108,18.998) 16.04,19 16.04,59.786 ccw(c15.114,59.814) 15.08,60.74 -48.548,60.74 cw(c-49.665,61.972) -49.611,60.31 -51.425,60.31 cw(c-51.382,61.925) -52.48,60.74 -54.465,60.74 ccw(c-54.485,59.685) -55.54,59.688 -55.54,-45.399 ccw(c-54.343,-45.42) -54.47,-46.61 -49.504,-46.61 cw(c-48.449,-46.79) -48.46,-45.72 -18.14,-45.72 cw(c-18.125,-46.615) 17.083,-46.61 17.084,-46.61 cw(c18.06,-46.668) 17.82,-45.72 30.553,-45.72 cw(c30.542,-46.635) 31.457,-46.61 39.609,-46.61 cw(c40.481,-46.59) 59.587,-45.72 cw(c59.588,-46.612) 60.48,-46.61 92.65,-46.61 94.51,-44.72 94.51,10.18
cut-out: 60.722,-1.09 60.675,-0.856 60.543,-0.657 60.344,-0.525 60.11,-0.478 59.876,-0.525 59.677,-0.657 59.545,-0.856 59.498,-1.09 59.545,-1.324 59.677,-1.523 59.876,-1.655 60.11,-1.702 60.344,-1.655 60.543,-1.523 60.675,-1.324 60.722,-1.09
cut-out: 37.078,-37.41 37.047,-37.254 36.958,-37.122 36.826,-37.033 36.67,-37.002 36.514,-37.033 36.382,-37.122 36.293,-37.254 36.262,-37.41 36.293,-37.566 36.382,-37.698 36.514,-37.787 36.67,-37.818 36.826,-37.787 36.958,-37.698 37.047,-37.566 37.078,-37.41
cut-out: 92.598,5.7 92.567,5.935 92.476,6.154 92.332,6.342 92.144,6.486 91.925,6.577 91.69,6.608 91.455,6.577 91.236,6.486 91.048,6.342 90.904,6.154 90.813,5.935 90.782,5.7 90.813,5.465 90.904,5.246 91.048,5.058 91.236,4.914 91.455,4.823 91.69,4.792 91.925,4.823 92.144,4.914 92.332,5.058 92.476,5.246 92.567,5.465 92.598,5.7
cut-out: -41.191,-38.73 -41.227,-38.456 -41.333,-38.2 -41.501,-37.981 -41.72,-37.813 -41.976,-37.707 -42.25,-37.671 -42.524,-37.707 -42.78,-37.813 -42.999,-37.981 -43.167,-38.2 -43.273,-38.456 -43.309,-38.73 -43.273,-39.004 -43.167,-39.26 -42.999,-39.479 -42.78,-39.647 -42.524,-39.753 -42.25,-39.789 -41.976,-39.753 -41.72,-39.647 -41.501,-39.479 -41.333,-39.26 -41.227,-39.004 -41.191,-38.73
cut-out: -31.27,15.05 -31.31,15.253 -31.425,15.425 -31.597,15.54 -31.8,15.58 -32.003,15.54 -32.175,15.425 -32.29,15.253 -32.33,15.05 -32.29,14.847 -32.175,14.675 -32.003,14.56 -31.8,14.52 -31.597,14.56 -31.425,14.675 -31.31,14.847 -31.27,15.05
cut-out: 58.008,-1.15 57.977,-0.915 57.886,-0.696 57.742,-0.508 57.554,-0.364 57.335,-0.273 57.1,-0.242 56.865,-0.273 56.646,-0.364 56.458,-0.508 56.314,-0.696 56.223,-0.915 56.192,-1.15 56.223,-1.385 56.314,-1.604 56.458,-1.792 56.646,-1.936 56.865,-2.027 57.1,-2.058 57.335,-2.027 57.554,-1.936 57.742,-1.792 57.886,-1.604 57.977,-1.385 58.008,-1.15
cut-out: -41.77,-41.89 -41.81,-41.687 -41.925,-41.515 -42.097,-41.4 -42.3,-41.36 -42.503,-41.4 -42.675,-41.515 -42.79,-41.687 -42.83,-41.89 -42.79,-42.093 -42.675,-42.265 -42.503,-42.38 -42.3,-42.42 -42.097,-42.38 -41.925,-42.265 -41.81,-42.093 -41.77,-41.89
cut-out: 58.038,-41.3 58.007,-41.065 57.916,-40.846 57.772,-40.658 57.584,-40.514 57.365,-40.423 57.13,-40.392 56.895,-40.423 56.676,-40.514 56.488,-40.658 56.344,-40.846 56.253,-41.065 56.222,-41.3 56.253,-41.535 56.344,-41.754 56.488,-41.942 56.676,-42.086 56.895,-42.177 57.13,-42.208 57.365,-42.177 57.584,-42.086 57.772,-41.942 57.916,-41.754 58.007,-41.535 58.038,-41.3
cut-out: 14.688,58.63 14.657,58.865 14.566,59.084 14.422,59.272 14.234,59.416 14.015,59.507 13.78,59.538 13.545,59.507 13.326,59.416 13.138,59.272 12.994,59.084 12.903,58.865 12.872,58.63 12.903,58.395 12.994,58.176 13.138,57.988 13.326,57.844 13.545,57.753 13.78,57.722 14.015,57.753 14.234,57.844 14.422,57.988 14.566,58.176 14.657,58.395 14.688,58.63
cut-out: -34.432,21.75 -34.463,21.906 -34.552,22.038 -34.684,22.127 -34.84,22.158 -34.996,22.127 -35.128,22.038 -35.217,21.906 -35.248,21.75 -35.217,21.594 -35.128,21.462 -34.996,21.373 -34.84,21.342 -34.684,21.373 -34.552,21.462 -34.463,21.594 -34.432,21.75
cut-out: 43.898,5.78 43.867,6.015 43.776,6.234 43.632,6.422 43.444,6.566 43.225,6.657 42.99,6.688 42.755,6.657 42.536,6.566 42.348,6.422 42.204,6.234 42.113,6.015 42.082,5.78 42.113,5.545 42.204,5.326 42.348,5.138 42.536,4.994 42.755,4.903 42.99,4.872 43.225,4.903 43.444,4.994 43.632,5.138 43.776,5.326 43.867,5.545 43.898,5.78
cut-out: 36.866,8.85 36.843,8.967 36.776,9.066 36.677,9.133 36.56,9.156 36.443,9.133 36.344,9.066 36.277,8.967 36.254,8.85 36.277,8.733 36.344,8.634 36.443,8.567 36.56,8.544 36.677,8.567 36.776,8.634 36.843,8.733 36.866,8.85
cut-out: 30.849,-40.71 30.813,-40.436 30.707,-40.18 30.539,-39.961 30.32,-39.793 30.064,-39.687 29.79,-39.651 29.516,-39.687 29.26,-39.793 29.041,-39.961 28.873,-40.18 28.767,-40.436 28.731,-40.71 28.767,-40.984 28.873,-41.24 29.041,-41.459 29.26,-41.627 29.516,-41.733 29.79,-41.769 30.064,-41.733 30.32,-41.627 30.539,-41.459 30.707,-41.24 30.813,-40.984 30.849,-40.71
cut-out: 30.769,12.09 30.733,12.364 30.627,12.62 30.459,12.839 30.24,13.007 29.984,13.113 29.71,13.149 29.436,13.113 29.18,13.007 28.961,12.839 28.793,12.62 28.687,12.364 28.651,12.09 28.687,11.816 28.793,11.56 28.961,11.341 29.18,11.173 29.436,11.067 29.71,11.031 29.984,11.067 30.24,11.173 30.459,11.341 30.627,11.56 30.733,11.816 30.769,12.09
cut-out: -51.792,-44.72 -51.823,-44.485 -51.914,-44.266 -52.058,-44.078 -52.246,-43.934 -52.465,-43.843 -52.7,-43.812 -52.935,-43.843 -53.154,-43.934 -53.342,-44.078 -53.486,-44.266 -53.577,-44.485 -53.608,-44.72 -53.577,-44.955 -53.486,-45.174 -53.342,-45.362 -53.154,-45.506 -52.935,-45.597 -52.7,-45.628 -52.465,-45.597 -52.246,-45.506 -52.058,-45.362 -51.914,-45.174 -51.823,-44.955 -51.792,-44.72
cut-out: -30.771,11.84 -30.807,12.114 -30.913,12.37 -31.081,12.589 -31.3,12.757 -31.556,12.863 -31.83,12.899 -32.104,12.863 -32.36,12.757 -32.579,12.589 -32.747,12.37 -32.853,12.114 -32.889,11.84 -32.853,11.566 -32.747,11.31 -32.579,11.091 -32.36,10.923 -32.104,10.817 -31.83,10.781 -31.556,10.817 -31.3,10.923 -31.081,11.091 -30.913,11.31 -30.807,11.566 -30.771,11.84
cut-out: -51.433,58.92 -51.401,59.08 -51.311,59.216 -51.175,59.306 -51.015,59.338 -50.855,59.306 -50.719,59.216 -50.629,59.08 -50.597,58.92 -50.605,58.92 -50.587,57.54 -50.619,57.38 -50.709,57.244 -50.845,57.154 -51.005,57.122 -51.165,57.154 -51.301,57.244 -51.391,57.38 -51.423,57.54 -51.415,57.54 -51.433,58.92 -51.401,59.08 -51.311,59.216 -51.175,59.306 -51.015,59.338 -50.855,59.306 -50.719,59.216 -50.629,59.08 -50.597,58.92 -50.605,58.92
cut-out: 60.742,-41.23 60.695,-40.996 60.563,-40.797 60.364,-40.665 60.13,-40.618 59.896,-40.665 59.697,-40.797 59.565,-40.996 59.518,-41.23 59.565,-41.464 59.697,-41.663 59.896,-41.795 60.13,-41.842 60.364,-41.795 60.563,-41.663 60.695,-41.464 60.742,-41.23
cut-out: -52.82,58.49 -52.81,57.97 -52.802,57.97 -52.833,57.735 -52.924,57.516 -53.068,57.328 -53.256,57.184 -53.475,57.093 -53.71,57.062 -53.945,57.093 -54.164,57.184 -54.352,57.328 -54.496,57.516 -54.587,57.735 -54.618,57.97 -54.62,58.49 -54.628,58.49 -54.597,58.725 -54.506,58.944 -54.362,59.132 -54.174,59.276 -53.955,59.367 -53.72,59.398 -53.485,59.367 -53.266,59.276 -53.078,59.132 -52.934,58.944 -52.843,58.725 -52.812,58.49 -52.82,58.49
cut-out: 37.846,-43.68 37.848,-43.67 37.817,-43.44 37.729,-43.226 37.588,-43.042 37.404,-42.901 37.19,-42.813 36.97,-42.784 36.96,-42.782 36.73,-42.813 36.516,-42.901 36.332,-43.042 36.191,-43.226 36.103,-43.44 36.074,-43.66 36.072,-43.67 36.103,-43.9 36.191,-44.114 36.332,-44.298 36.516,-44.439 36.73,-44.527 36.95,-44.556 36.96,-44.558 37.19,-44.527 37.404,-44.439 37.588,-44.298 37.729,-44.114 37.817,-43.9 37.846,-43.68
cut-out: 88.816,5.75 88.793,5.867 88.726,5.966 88.627,6.033 88.51,6.056 88.393,6.033 88.294,5.966 88.227,5.867 88.204,5.75 88.227,5.633 88.294,5.534 88.393,5.467 88.51,5.444 88.627,5.467 88.726,5.534 88.793,5.633 88.816,5.75
cut-out: 91.448,-44.73 91.417,-44.495 91.326,-44.276 91.182,-44.088 90.994,-43.944 90.775,-43.853 90.54,-43.822 90.305,-43.853 90.086,-43.944 89.898,-44.088 89.754,-44.276 89.663,-44.495 89.632,-44.73 89.663,-44.965 89.754,-45.184 89.898,-45.372 90.086,-45.516 90.305,-45.607 90.54,-45.638 90.775,-45.607 90.994,-45.516 91.182,-45.372 91.326,-45.184 91.417,-44.965 91.448,-44.73
cut-out: -13.998,21.72 -14.045,21.954 -14.177,22.153 -14.376,22.285 -14.61,22.332 -14.844,22.285 -15.043,22.153 -15.175,21.954 -15.222,21.72 -15.175,21.486 -15.043,21.287 -14.844,21.155 -14.61,21.108 -14.376,21.155 -14.177,21.287 -14.045,21.486 -13.998,21.72
cut-out: -122.159,103.3 -122.124,103.124 -122.024,102.976 -121.876,102.876 -121.7,102.841 -121.524,102.876 -121.376,102.976 -121.276,103.124 -121.241,103.3 -121.25,103.3 -121.25,105 -121.241,105 -121.276,105.176 -121.376,105.324 -121.524,105.424 -121.7,105.459 -121.876,105.424 -122.024,105.324 -122.124,105.176 -122.159,105 -122.15,105 -122.15,103.3
cut-out: 46.629,5.77 46.594,5.946 46.494,6.094 46.346,6.194 46.17,6.229 45.994,6.194 45.846,6.094 45.746,5.946 45.711,5.77 45.746,5.594 45.846,5.446 45.994,5.346 46.17,5.311 46.346,5.346 46.494,5.446 46.594,5.594 46.629,5.77
cut-out: -28.049,58.55 -28.014,58.374 -27.914,58.226 -27.766,58.126 -27.59,58.091 -27.414,58.126 -27.266,58.226 -27.166,58.374 -27.131,58.55 -27.14,58.55 -27.14,60.25 -27.131,60.25 -27.166,60.426 -27.266,60.574 -27.414,60.674 -27.59,60.709 -27.766,60.674 -27.914,60.574 -28.014,60.426 -28.049,60.25 -28.04,60.25 -28.04,58.55
cut-out: -19.54,56.04 -19.345,56.079 -19.18,56.19 -19.069,56.355 -19.03,56.55 -19.069,56.745 -19.18,56.91 -19.345,57.021 -19.54,57.06 -19.54,57.05 -20.64,57.05 -20.64,57.06 -20.835,57.021 -21,56.91 -21.111,56.745 -21.15,56.55 -21.111,56.355 -21,56.19 -20.835,56.079 -20.64,56.04 -20.64,56.05 -19.54,56.05
cut-out: -24.14,56.04 -23.945,56.079 -23.78,56.19 -23.669,56.355 -23.63,56.55 -23.669,56.745 -23.78,56.91 -23.945,57.021 -24.14,57.06 -24.14,57.05 -25.24,57.05 -25.24,57.06 -25.435,57.021 -25.6,56.91 -25.711,56.745 -25.75,56.55 -25.711,56.355 -25.6,56.19 -25.435,56.079 -25.24,56.04 -25.24,56.05 -24.14,56.05
cut-out: -24.089,57.149 -23.976,57.236 -23.849,57.401 -23.77,57.594 -23.743,57.8 -23.77,58.006 -23.849,58.199 -23.889,58.251 -23.976,58.364 -24.141,58.491 -24.334,58.57 -24.54,58.597 -24.746,58.57 -24.939,58.491 -24.991,58.451 -25.104,58.364 -25.231,58.199 -25.31,58.006 -25.337,57.8 -25.31,57.594 -25.231,57.401 -25.191,57.349 -25.104,57.236 -24.939,57.109 -24.746,57.03 -24.54,57.003 -24.334,57.03 -24.141,57.109 -24.089,57.149
cut-out: 48.904,17.396 48.81,17.256 48.777,17.09 48.81,16.924 48.904,16.784 49.044,16.69 49.21,16.657 49.376,16.69 49.516,16.784 49.61,16.924 49.643,17.09 49.61,17.256 49.516,17.396 49.376,17.49 49.21,17.523 49.044,17.49 48.904,17.396
cut-out: 45.504,17.396 45.41,17.256 45.377,17.09 45.41,16.924 45.504,16.784 45.644,16.69 45.81,16.657 45.976,16.69 46.116,16.784 46.21,16.924 46.243,17.09 46.21,17.256 46.116,17.396 45.976,17.49 45.81,17.523 45.644,17.49 45.504,17.396
cut-out: -5.849,52.489 -5.736,52.576 -5.609,52.741 -5.53,52.934 -5.503,53.14 -5.53,53.346 -5.609,53.539 -5.649,53.591 -5.736,53.704 -5.901,53.831 -6.094,53.91 -6.3,53.937 -6.506,53.91 -6.699,53.831 -6.751,53.791 -6.864,53.704 -6.991,53.539 -7.07,53.346 -7.097,53.14 -7.07,52.934 -6.991,52.741 -6.951,52.689 -6.864,52.576 -6.699,52.449 -6.506,52.37 -6.3,52.343 -6.094,52.37 -5.901,52.449 -5.849,52.489
cut-out: -5.849,56.489 -5.736,56.576 -5.609,56.741 -5.53,56.934 -5.503,57.14 -5.53,57.346 -5.609,57.539 -5.649,57.591 -5.736,57.704 -5.901,57.831 -6.094,57.91 -6.3,57.937 -6.506,57.91 -6.699,57.831 -6.751,57.791 -6.864,57.704 -6.991,57.539 -7.07,57.346 -7.097,57.14 -7.07,56.934 -6.991,56.741 -6.951,56.689 -6.864,56.576 -6.699,56.449 -6.506,56.37 -6.3,56.343 -6.094,56.37 -5.901,56.449 -5.849,56.489
cut-out: -15.097,53.888 -15.016,54.01 -14.98,54.19 -15.016,54.37 -15.118,54.522 -15.148,54.543 -15.27,54.624 -15.45,54.66 -15.63,54.624 -15.782,54.522 -15.803,54.492 -15.884,54.37 -15.92,54.19 -15.884,54.01 -15.782,53.858 -15.752,53.837 -15.63,53.756 -15.45,53.72 -15.27,53.756 -15.118,53.858 -15.097,53.888
cut-out: -30.747,53.837 -30.666,53.959 -30.63,54.139 -30.666,54.319 -30.768,54.471 -30.798,54.492 -30.92,54.573 -31.1,54.609 -31.28,54.573 -31.432,54.471 -31.453,54.441 -31.534,54.319 -31.57,54.139 -31.534,53.959 -31.432,53.807 -31.402,53.787 -31.28,53.705 -31.1,53.669 -30.92,53.705 -30.768,53.807 -30.747,53.837

## Design rules (kind name [scope] priority, off if disabled: settings)
Clearance "Clearence 0.25_Polygon" [InNamedPolygon('F.Cu-GND') OR InNamedPolygon('F.Cu-GND-1') OR InNamedPolygon('F.Cu-GND-2') OR InNamedPolygon('F.Cu-GND-3') OR InNamedPolygon('F.Cu-GND-4') OR InNamedPolygon('F.Cu-GND-5') OR InNamedPolygon('F.Cu-GND-6') OR InNamedPolygon('F.Cu-GND-7') OR InNamedPolygon('F.Cu-GND-8') OR InNamedPolygon('F.Cu-GND-9') OR InNamedPolygon('B.Cu-') OR InNamedPolygon('B.Cu-GND') OR InNamedPolygon('B.Cu-GND-1') OR InNamedPolygon('B.Cu-GND-2') OR InNamedPolygon('B.Cu-GND-3') OR InNamedPolygon('B.Cu-GND-4') OR InNamedPolygon('B.Cu-GND-5') OR InNamedPolygon('In2.Cu-PNET2') OR InNamedPolygon('In2.Cu-PNET7') OR InNamedPolygon('In2.Cu-PNET10') OR InNamedPolygon('In2.Cu-PNET4') OR InNamedPolygon('In2.Cu-PNET12') OR InNamedPolygon('In2.Cu-PNET9') OR InNamedPolygon('In2.Cu-PNET6') OR InNamedPolygon('In2.Cu-PNET8') OR InNamedPolygon('In2.Cu-PNET3') OR InNamedPolygon('In2.Cu-PNET5') OR InNamedPolygon('In2.Cu-PNET5-1') OR InNamedPolygon('In2.Cu-PNET1') OR InNamedPolygon('In3.Cu-PNET5') OR InNamedPolygon('In3.Cu-PNET5-1') OR InNamedPolygon('In3.Cu-PNET5-2') OR InNamedPolygon('In3.Cu-PNET5-3') OR InNamedPolygon('In4.Cu-PNET5') OR InNamedPolygon('In4.Cu-PNET5-1') OR InNamedPolygon('In4.Cu-PNET5-2') OR InNamedPolygon('In5.Cu-PNET5') OR InNamedPolygon('In6.Cu-PNET5') OR InNamedPolygon('In7.Cu-GND')] p1: gap=0.25 ignorepadtopadclearanceinfootprint=FALSE
MinimumSolderMaskSliver [All] p1: minsoldermaskwidth=0
PolygonConnect Polygon_In7.Cu-GND_ConnectDirect [IsNamedPolygon('In7.Cu-GND') vs IsVia] p1: connectstyle=Direct reliefconductorwidth=0.254 reliefentries=4 polygonreliefangle="90 Angle" airgapwidth=0.254
PolygonConnect Polygon_In7.Cu-GND_ConnectRelief45 [IsNamedPolygon('In7.Cu-GND') vs (IsThruPin or IsSMTPin) and (PadShape_AllLayers = 'Round')] p2: connectstyle=Relief reliefconductorwidth=0.5 reliefentries=4 polygonreliefangle="45 Angle" airgapwidth=0.5
PolygonConnect Polygon_In7.Cu-GND_ConnectRelief90 [IsNamedPolygon('In7.Cu-GND') vs (IsThruPin or IsSMTPin) and (PadShape_AllLayers <> 'Round')] p3: connectstyle=Relief reliefconductorwidth=0.5 reliefentries=4 polygonreliefangle="90 Angle" airgapwidth=0.5
PolygonConnect Polygon_In6.Cu-PNET5_ConnectDirect [IsNamedPolygon('In6.Cu-PNET5') vs IsVia] p4: connectstyle=Direct reliefconductorwidth=0.254 reliefentries=4 polygonreliefangle="90 Angle" airgapwidth=0.254
PolygonConnect Polygon_In6.Cu-PNET5_ConnectRelief45 [IsNamedPolygon('In6.Cu-PNET5') vs (IsThruPin or IsSMTPin) and (PadShape_AllLayers = 'Round')] p5: connectstyle=Relief reliefconductorwidth=0.5 reliefentries=4 polygonreliefangle="45 Angle" airgapwidth=0.5
PolygonConnect Polygon_In6.Cu-PNET5_ConnectRelief90 [IsNamedPolygon('In6.Cu-PNET5') vs (IsThruPin or IsSMTPin) and (PadShape_AllLayers <> 'Round')] p6: connectstyle=Relief reliefconductorwidth=0.5 reliefentries=4 polygonreliefangle="90 Angle" airgapwidth=0.5
PolygonConnect Polygon_In5.Cu-PNET5_ConnectDirect [IsNamedPolygon('In5.Cu-PNET5') vs IsVia] p7: connectstyle=Direct reliefconductorwidth=0.254 reliefentries=4 polygonreliefangle="90 Angle" airgapwidth=0.254
PolygonConnect Polygon_In5.Cu-PNET5_ConnectRelief45 [IsNamedPolygon('In5.Cu-PNET5') vs (IsThruPin or IsSMTPin) and (PadShape_AllLayers = 'Round')] p8: connectstyle=Relief reliefconductorwidth=0.5 reliefentries=4 polygonreliefangle="45 Angle" airgapwidth=0.5
PolygonConnect Polygon_In5.Cu-PNET5_ConnectRelief90 [IsNamedPolygon('In5.Cu-PNET5') vs (IsThruPin or IsSMTPin) and (PadShape_AllLayers <> 'Round')] p9: connectstyle=Relief reliefconductorwidth=0.5 reliefentries=4 polygonreliefangle="90 Angle" airgapwidth=0.5
PolygonConnect Polygon_In4.Cu-PNET5-2_ConnectDirect [IsNamedPolygon('In4.Cu-PNET5-2') vs IsVia] p10: connectstyle=Direct reliefconductorwidth=0.254 reliefentries=4 polygonreliefangle="90 Angle" airgapwidth=0.254
PolygonConnect Polygon_In4.Cu-PNET5-2_ConnectRelief45 [IsNamedPolygon('In4.Cu-PNET5-2') vs (IsThruPin or IsSMTPin) and (PadShape_AllLayers = 'Round')] p11: connectstyle=Relief reliefconductorwidth=0.5 reliefentries=4 polygonreliefangle="45 Angle" airgapwidth=0.5
PolygonConnect Polygon_In4.Cu-PNET5-2_ConnectRelief90 [IsNamedPolygon('In4.Cu-PNET5-2') vs (IsThruPin or IsSMTPin) and (PadShape_AllLayers <> 'Round')] p12: connectstyle=Relief reliefconductorwidth=0.5 reliefentries=4 polygonreliefangle="90 Angle" airgapwidth=0.5
PolygonConnect Polygon_In4.Cu-PNET5-1_ConnectDirect [IsNamedPolygon('In4.Cu-PNET5-1') vs IsVia] p13: connectstyle=Direct reliefconductorwidth=0.254 reliefentries=4 polygonreliefangle="90 Angle" airgapwidth=0.254
PolygonConnect Polygon_In4.Cu-PNET5-1_ConnectRelief45 [IsNamedPolygon('In4.Cu-PNET5-1') vs (IsThruPin or IsSMTPin) and (PadShape_AllLayers = 'Round')] p14: connectstyle=Relief reliefconductorwidth=0.5 reliefentries=4 polygonreliefangle="45 Angle" airgapwidth=0.5
PolygonConnect Polygon_In4.Cu-PNET5-1_ConnectRelief90 [IsNamedPolygon('In4.Cu-PNET5-1') vs (IsThruPin or IsSMTPin) and (PadShape_AllLayers <> 'Round')] p15: connectstyle=Relief reliefconductorwidth=0.5 reliefentries=4 polygonreliefangle="90 Angle" airgapwidth=0.5
PolygonConnect Polygon_In4.Cu-PNET5_ConnectDirect [IsNamedPolygon('In4.Cu-PNET5') vs IsVia] p16: connectstyle=Direct reliefconductorwidth=0.254 reliefentries=4 polygonreliefangle="90 Angle" airgapwidth=0.254
PolygonConnect Polygon_In4.Cu-PNET5_ConnectRelief45 [IsNamedPolygon('In4.Cu-PNET5') vs (IsThruPin or IsSMTPin) and (PadShape_AllLayers = 'Round')] p17: connectstyle=Relief reliefconductorwidth=0.5 reliefentries=4 polygonreliefangle="45 Angle" airgapwidth=0.5
PolygonConnect Polygon_In4.Cu-PNET5_ConnectRelief90 [IsNamedPolygon('In4.Cu-PNET5') vs (IsThruPin or IsSMTPin) and (PadShape_AllLayers <> 'Round')] p18: connectstyle=Relief reliefconductorwidth=0.5 reliefentries=4 polygonreliefangle="90 Angle" airgapwidth=0.5
PolygonConnect Polygon_In3.Cu-PNET5-3_ConnectDirect [IsNamedPolygon('In3.Cu-PNET5-3') vs IsVia] p19: connectstyle=Direct reliefconductorwidth=0.254 reliefentries=4 polygonreliefangle="90 Angle" airgapwidth=0.254
PolygonConnect Polygon_In3.Cu-PNET5-3_ConnectRelief45 [IsNamedPolygon('In3.Cu-PNET5-3') vs (IsThruPin or IsSMTPin) and (PadShape_AllLayers = 'Round')] p20: connectstyle=Relief reliefconductorwidth=0.5 reliefentries=4 polygonreliefangle="45 Angle" airgapwidth=0.5
PolygonConnect Polygon_In3.Cu-PNET5-3_ConnectRelief90 [IsNamedPolygon('In3.Cu-PNET5-3') vs (IsThruPin or IsSMTPin) and (PadShape_AllLayers <> 'Round')] p21: connectstyle=Relief reliefconductorwidth=0.5 reliefentries=4 polygonreliefangle="90 Angle" airgapwidth=0.5
PolygonConnect Polygon_In3.Cu-PNET5-2_ConnectDirect [IsNamedPolygon('In3.Cu-PNET5-2') vs IsVia] p22: connectstyle=Direct reliefconductorwidth=0.254 reliefentries=4 polygonreliefangle="90 Angle" airgapwidth=0.254
PolygonConnect Polygon_In3.Cu-PNET5-2_ConnectRelief45 [IsNamedPolygon('In3.Cu-PNET5-2') vs (IsThruPin or IsSMTPin) and (PadShape_AllLayers = 'Round')] p23: connectstyle=Relief reliefconductorwidth=0.5 reliefentries=4 polygonreliefangle="45 Angle" airgapwidth=0.5
PolygonConnect Polygon_In3.Cu-PNET5-2_ConnectRelief90 [IsNamedPolygon('In3.Cu-PNET5-2') vs (IsThruPin or IsSMTPin) and (PadShape_AllLayers <> 'Round')] p24: connectstyle=Relief reliefconductorwidth=0.5 reliefentries=4 polygonreliefangle="90 Angle" airgapwidth=0.5
PolygonConnect Polygon_In3.Cu-PNET5-1_ConnectDirect [IsNamedPolygon('In3.Cu-PNET5-1') vs IsVia] p25: connectstyle=Direct reliefconductorwidth=0.254 reliefentries=4 polygonreliefangle="90 Angle" airgapwidth=0.254
PolygonConnect Polygon_In3.Cu-PNET5-1_ConnectRelief45 [IsNamedPolygon('In3.Cu-PNET5-1') vs (IsThruPin or IsSMTPin) and (PadShape_AllLayers = 'Round')] p26: connectstyle=Relief reliefconductorwidth=0.5 reliefentries=4 polygonreliefangle="45 Angle" airgapwidth=0.5
PolygonConnect Polygon_In3.Cu-PNET5-1_ConnectRelief90 [IsNamedPolygon('In3.Cu-PNET5-1') vs (IsThruPin or IsSMTPin) and (PadShape_AllLayers <> 'Round')] p27: connectstyle=Relief reliefconductorwidth=0.5 reliefentries=4 polygonreliefangle="90 Angle" airgapwidth=0.5
PolygonConnect Polygon_In3.Cu-PNET5_ConnectDirect [IsNamedPolygon('In3.Cu-PNET5') vs IsVia] p28: connectstyle=Direct reliefconductorwidth=0.254 reliefentries=4 polygonreliefangle="90 Angle" airgapwidth=0.254
PolygonConnect Polygon_In3.Cu-PNET5_ConnectRelief45 [IsNamedPolygon('In3.Cu-PNET5') vs (IsThruPin or IsSMTPin) and (PadShape_AllLayers = 'Round')] p29: connectstyle=Relief reliefconductorwidth=0.5 reliefentries=4 polygonreliefangle="45 Angle" airgapwidth=0.5
PolygonConnect Polygon_In3.Cu-PNET5_ConnectRelief90 [IsNamedPolygon('In3.Cu-PNET5') vs (IsThruPin or IsSMTPin) and (PadShape_AllLayers <> 'Round')] p30: connectstyle=Relief reliefconductorwidth=0.5 reliefentries=4 polygonreliefangle="90 Angle" airgapwidth=0.5
PolygonConnect Polygon_In2.Cu-PNET1_ConnectDirect [IsNamedPolygon('In2.Cu-PNET1') vs IsVia] p31: connectstyle=Direct reliefconductorwidth=0.254 reliefentries=4 polygonreliefangle="90 Angle" airgapwidth=0.254
PolygonConnect Polygon_In2.Cu-PNET1_ConnectRelief45 [IsNamedPolygon('In2.Cu-PNET1') vs (IsThruPin or IsSMTPin) and (PadShape_AllLayers = 'Round')] p32: connectstyle=Relief reliefconductorwidth=0.5 reliefentries=4 polygonreliefangle="45 Angle" airgapwidth=0.5
PolygonConnect Polygon_In2.Cu-PNET1_ConnectRelief90 [IsNamedPolygon('In2.Cu-PNET1') vs (IsThruPin or IsSMTPin) and (PadShape_AllLayers <> 'Round')] p33: connectstyle=Relief reliefconductorwidth=0.5 reliefentries=4 polygonreliefangle="90 Angle" airgapwidth=0.5
PolygonConnect Polygon_In2.Cu-PNET5-1_ConnectDirect [IsNamedPolygon('In2.Cu-PNET5-1') vs IsVia] p34: connectstyle=Direct reliefconductorwidth=0.254 reliefentries=4 polygonreliefangle="90 Angle" airgapwidth=0.254
PolygonConnect Polygon_In2.Cu-PNET5-1_ConnectRelief45 [IsNamedPolygon('In2.Cu-PNET5-1') vs (IsThruPin or IsSMTPin) and (PadShape_AllLayers = 'Round')] p35: connectstyle=Relief reliefconductorwidth=0.5 reliefentries=4 polygonreliefangle="45 Angle" airgapwidth=0.5
PolygonConnect Polygon_In2.Cu-PNET5-1_ConnectRelief90 [IsNamedPolygon('In2.Cu-PNET5-1') vs (IsThruPin or IsSMTPin) and (PadShape_AllLayers <> 'Round')] p36: connectstyle=Relief reliefconductorwidth=0.5 reliefentries=4 polygonreliefangle="90 Angle" airgapwidth=0.5
PolygonConnect Polygon_In2.Cu-PNET5_ConnectDirect [IsNamedPolygon('In2.Cu-PNET5') vs IsVia] p37: connectstyle=Direct reliefconductorwidth=0.254 reliefentries=4 polygonreliefangle="90 Angle" airgapwidth=0.254
PolygonConnect Polygon_In2.Cu-PNET5_ConnectRelief45 [IsNamedPolygon('In2.Cu-PNET5') vs (IsThruPin or IsSMTPin) and (PadShape_AllLayers = 'Round')] p38: connectstyle=Relief reliefconductorwidth=0.5 reliefentries=4 polygonreliefangle="45 Angle" airgapwidth=0.5
PolygonConnect Polygon_In2.Cu-PNET5_ConnectRelief90 [IsNamedPolygon('In2.Cu-PNET5') vs (IsThruPin or IsSMTPin) and (PadShape_AllLayers <> 'Round')] p39: connectstyle=Relief reliefconductorwidth=0.5 reliefentries=4 polygonreliefangle="90 Angle" airgapwidth=0.5
PolygonConnect Polygon_In2.Cu-PNET3_ConnectDirect [IsNamedPolygon('In2.Cu-PNET3') vs IsVia] p40: connectstyle=Direct reliefconductorwidth=0.254 reliefentries=4 polygonreliefangle="90 Angle" airgapwidth=0.254
PolygonConnect Polygon_In2.Cu-PNET3_ConnectRelief45 [IsNamedPolygon('In2.Cu-PNET3') vs (IsThruPin or IsSMTPin) and (PadShape_AllLayers = 'Round')] p41: connectstyle=Relief reliefconductorwidth=0.5 reliefentries=4 polygonreliefangle="45 Angle" airgapwidth=0.5
PolygonConnect Polygon_In2.Cu-PNET3_ConnectRelief90 [IsNamedPolygon('In2.Cu-PNET3') vs (IsThruPin or IsSMTPin) and (PadShape_AllLayers <> 'Round')] p42: connectstyle=Relief reliefconductorwidth=0.5 reliefentries=4 polygonreliefangle="90 Angle" airgapwidth=0.5
PolygonConnect Polygon_In2.Cu-PNET8_ConnectDirect [IsNamedPolygon('In2.Cu-PNET8') vs IsVia] p43: connectstyle=Direct reliefconductorwidth=0.254 reliefentries=4 polygonreliefangle="90 Angle" airgapwidth=0.254
PolygonConnect Polygon_In2.Cu-PNET8_ConnectRelief45 [IsNamedPolygon('In2.Cu-PNET8') vs (IsThruPin or IsSMTPin) and (PadShape_AllLayers = 'Round')] p44: connectstyle=Relief reliefconductorwidth=0.5 reliefentries=4 polygonreliefangle="45 Angle" airgapwidth=0.5
PolygonConnect Polygon_In2.Cu-PNET8_ConnectRelief90 [IsNamedPolygon('In2.Cu-PNET8') vs (IsThruPin or IsSMTPin) and (PadShape_AllLayers <> 'Round')] p45: connectstyle=Relief reliefconductorwidth=0.5 reliefentries=4 polygonreliefangle="90 Angle" airgapwidth=0.5
PolygonConnect Polygon_In2.Cu-PNET6_ConnectDirect [IsNamedPolygon('In2.Cu-PNET6') vs IsVia] p46: connectstyle=Direct reliefconductorwidth=0.254 reliefentries=4 polygonreliefangle="90 Angle" airgapwidth=0.254
PolygonConnect Polygon_In2.Cu-PNET6_ConnectRelief45 [IsNamedPolygon('In2.Cu-PNET6') vs (IsThruPin or IsSMTPin) and (PadShape_AllLayers = 'Round')] p47: connectstyle=Relief reliefconductorwidth=0.5 reliefentries=4 polygonreliefangle="45 Angle" airgapwidth=0.5
PolygonConnect Polygon_In2.Cu-PNET6_ConnectRelief90 [IsNamedPolygon('In2.Cu-PNET6') vs (IsThruPin or IsSMTPin) and (PadShape_AllLayers <> 'Round')] p48: connectstyle=Relief reliefconductorwidth=0.5 reliefentries=4 polygonreliefangle="90 Angle" airgapwidth=0.5
PolygonConnect Polygon_In2.Cu-PNET9_ConnectDirect [IsNamedPolygon('In2.Cu-PNET9') vs IsVia] p49: connectstyle=Direct reliefconductorwidth=0.254 reliefentries=4 polygonreliefangle="90 Angle" airgapwidth=0.254
PolygonConnect Polygon_In2.Cu-PNET9_ConnectRelief45 [IsNamedPolygon('In2.Cu-PNET9') vs (IsThruPin or IsSMTPin) and (PadShape_AllLayers = 'Round')] p50: connectstyle=Relief reliefconductorwidth=0.5 reliefentries=4 polygonreliefangle="45 Angle" airgapwidth=0.5
PolygonConnect Polygon_In2.Cu-PNET9_ConnectRelief90 [IsNamedPolygon('In2.Cu-PNET9') vs (IsThruPin or IsSMTPin) and (PadShape_AllLayers <> 'Round')] p51: connectstyle=Relief reliefconductorwidth=0.5 reliefentries=4 polygonreliefangle="90 Angle" airgapwidth=0.5
PolygonConnect Polygon_In2.Cu-PNET12_ConnectDirect [IsNamedPolygon('In2.Cu-PNET12') vs IsVia] p52: connectstyle=Direct reliefconductorwidth=0.254 reliefentries=4 polygonreliefangle="90 Angle" airgapwidth=0.254
PolygonConnect Polygon_In2.Cu-PNET12_ConnectRelief45 [IsNamedPolygon('In2.Cu-PNET12') vs (IsThruPin or IsSMTPin) and (PadShape_AllLayers = 'Round')] p53: connectstyle=Relief reliefconductorwidth=0.5 reliefentries=4 polygonreliefangle="45 Angle" airgapwidth=0.5
PolygonConnect Polygon_In2.Cu-PNET12_ConnectRelief90 [IsNamedPolygon('In2.Cu-PNET12') vs (IsThruPin or IsSMTPin) and (PadShape_AllLayers <> 'Round')] p54: connectstyle=Relief reliefconductorwidth=0.5 reliefentries=4 polygonreliefangle="90 Angle" airgapwidth=0.5
PolygonConnect Polygon_In2.Cu-PNET4_ConnectDirect [IsNamedPolygon('In2.Cu-PNET4') vs IsVia] p55: connectstyle=Direct reliefconductorwidth=0.254 reliefentries=4 polygonreliefangle="90 Angle" airgapwidth=0.254
PolygonConnect Polygon_In2.Cu-PNET4_ConnectRelief45 [IsNamedPolygon('In2.Cu-PNET4') vs (IsThruPin or IsSMTPin) and (PadShape_AllLayers = 'Round')] p56: connectstyle=Relief reliefconductorwidth=0.5 reliefentries=4 polygonreliefangle="45 Angle" airgapwidth=0.5
PolygonConnect Polygon_In2.Cu-PNET4_ConnectRelief90 [IsNamedPolygon('In2.Cu-PNET4') vs (IsThruPin or IsSMTPin) and (PadShape_AllLayers <> 'Round')] p57: connectstyle=Relief reliefconductorwidth=0.5 reliefentries=4 polygonreliefangle="90 Angle" airgapwidth=0.5
PolygonConnect Polygon_In2.Cu-PNET10_ConnectDirect [IsNamedPolygon('In2.Cu-PNET10') vs IsVia] p58: connectstyle=Direct reliefconductorwidth=0.254 reliefentries=4 polygonreliefangle="90 Angle" airgapwidth=0.254
PolygonConnect Polygon_In2.Cu-PNET10_ConnectRelief45 [IsNamedPolygon('In2.Cu-PNET10') vs (IsThruPin or IsSMTPin) and (PadShape_AllLayers = 'Round')] p59: connectstyle=Relief reliefconductorwidth=0.5 reliefentries=4 polygonreliefangle="45 Angle" airgapwidth=0.5
PolygonConnect Polygon_In2.Cu-PNET10_ConnectRelief90 [IsNamedPolygon('In2.Cu-PNET10') vs (IsThruPin or IsSMTPin) and (PadShape_AllLayers <> 'Round')] p60: connectstyle=Relief reliefconductorwidth=0.5 reliefentries=4 polygonreliefangle="90 Angle" airgapwidth=0.5
PolygonConnect Polygon_In2.Cu-PNET7_ConnectDirect [IsNamedPolygon('In2.Cu-PNET7') vs IsVia] p61: connectstyle=Direct reliefconductorwidth=0.254 reliefentries=4 polygonreliefangle="90 Angle" airgapwidth=0.254
PolygonConnect Polygon_In2.Cu-PNET7_ConnectRelief45 [IsNamedPolygon('In2.Cu-PNET7') vs (IsThruPin or IsSMTPin) and (PadShape_AllLayers = 'Round')] p62: connectstyle=Relief reliefconductorwidth=0.5 reliefentries=4 polygonreliefangle="45 Angle" airgapwidth=0.5
PolygonConnect Polygon_In2.Cu-PNET7_ConnectRelief90 [IsNamedPolygon('In2.Cu-PNET7') vs (IsThruPin or IsSMTPin) and (PadShape_AllLayers <> 'Round')] p63: connectstyle=Relief reliefconductorwidth=0.5 reliefentries=4 polygonreliefangle="90 Angle" airgapwidth=0.5
PolygonConnect Polygon_In2.Cu-PNET2_ConnectDirect [IsNamedPolygon('In2.Cu-PNET2') vs IsVia] p64: connectstyle=Direct reliefconductorwidth=0.254 reliefentries=4 polygonreliefangle="90 Angle" airgapwidth=0.254
PolygonConnect Polygon_In2.Cu-PNET2_ConnectRelief45 [IsNamedPolygon('In2.Cu-PNET2') vs (IsThruPin or IsSMTPin) and (PadShape_AllLayers = 'Round')] p65: connectstyle=Relief reliefconductorwidth=0.5 reliefentries=4 polygonreliefangle="45 Angle" airgapwidth=0.5
PolygonConnect Polygon_In2.Cu-PNET2_ConnectRelief90 [IsNamedPolygon('In2.Cu-PNET2') vs (IsThruPin or IsSMTPin) and (PadShape_AllLayers <> 'Round')] p66: connectstyle=Relief reliefconductorwidth=0.5 reliefentries=4 polygonreliefangle="90 Angle" airgapwidth=0.5
PolygonConnect Polygon_B.Cu-GND-5_ConnectDirect [IsNamedPolygon('B.Cu-GND-5') vs IsVia] p67: connectstyle=Direct reliefconductorwidth=0.254 reliefentries=4 polygonreliefangle="90 Angle" airgapwidth=0.254
PolygonConnect Polygon_B.Cu-GND-5_ConnectRelief45 [IsNamedPolygon('B.Cu-GND-5') vs (IsThruPin or IsSMTPin) and (PadShape_AllLayers = 'Round')] p68: connectstyle=Relief reliefconductorwidth=0.5 reliefentries=4 polygonreliefangle="45 Angle" airgapwidth=0.5
PolygonConnect Polygon_B.Cu-GND-5_ConnectRelief90 [IsNamedPolygon('B.Cu-GND-5') vs (IsThruPin or IsSMTPin) and (PadShape_AllLayers <> 'Round')] p69: connectstyle=Relief reliefconductorwidth=0.5 reliefentries=4 polygonreliefangle="90 Angle" airgapwidth=0.5
PolygonConnect Polygon_B.Cu-GND-4_ConnectDirect [IsNamedPolygon('B.Cu-GND-4') vs IsVia] p70: connectstyle=Direct reliefconductorwidth=0.254 reliefentries=4 polygonreliefangle="90 Angle" airgapwidth=0.254
PolygonConnect Polygon_B.Cu-GND-4_ConnectRelief45 [IsNamedPolygon('B.Cu-GND-4') vs (IsThruPin or IsSMTPin) and (PadShape_AllLayers = 'Round')] p71: connectstyle=Relief reliefconductorwidth=0.5 reliefentries=4 polygonreliefangle="45 Angle" airgapwidth=0.5
PolygonConnect Polygon_B.Cu-GND-4_ConnectRelief90 [IsNamedPolygon('B.Cu-GND-4') vs (IsThruPin or IsSMTPin) and (PadShape_AllLayers <> 'Round')] p72: connectstyle=Relief reliefconductorwidth=0.5 reliefentries=4 polygonreliefangle="90 Angle" airgapwidth=0.5
PolygonConnect Polygon_B.Cu-GND-3_ConnectDirect [IsNamedPolygon('B.Cu-GND-3') vs IsVia] p73: connectstyle=Direct reliefconductorwidth=0.254 reliefentries=4 polygonreliefangle="90 Angle" airgapwidth=0.254
PolygonConnect Polygon_B.Cu-GND-3_ConnectRelief45 [IsNamedPolygon('B.Cu-GND-3') vs (IsThruPin or IsSMTPin) and (PadShape_AllLayers = 'Round')] p74: connectstyle=Relief reliefconductorwidth=0.5 reliefentries=4 polygonreliefangle="45 Angle" airgapwidth=0.5
PolygonConnect Polygon_B.Cu-GND-3_ConnectRelief90 [IsNamedPolygon('B.Cu-GND-3') vs (IsThruPin or IsSMTPin) and (PadShape_AllLayers <> 'Round')] p75: connectstyle=Relief reliefconductorwidth=0.5 reliefentries=4 polygonreliefangle="90 Angle" airgapwidth=0.5
PolygonConnect Polygon_B.Cu-GND-2_ConnectDirect [IsNamedPolygon('B.Cu-GND-2') vs IsVia] p76: connectstyle=Direct reliefconductorwidth=0.254 reliefentries=4 polygonreliefangle="90 Angle" airgapwidth=0.254
PolygonConnect Polygon_B.Cu-GND-2_ConnectRelief45 [IsNamedPolygon('B.Cu-GND-2') vs (IsThruPin or IsSMTPin) and (PadShape_AllLayers = 'Round')] p77: connectstyle=Relief reliefconductorwidth=0.5 reliefentries=4 polygonreliefangle="45 Angle" airgapwidth=0.5
PolygonConnect Polygon_B.Cu-GND-2_ConnectRelief90 [IsNamedPolygon('B.Cu-GND-2') vs (IsThruPin or IsSMTPin) and (PadShape_AllLayers <> 'Round')] p78: connectstyle=Relief reliefconductorwidth=0.5 reliefentries=4 polygonreliefangle="90 Angle" airgapwidth=0.5
PolygonConnect Polygon_B.Cu-GND-1_ConnectDirect [IsNamedPolygon('B.Cu-GND-1') vs IsVia] p79: connectstyle=Direct reliefconductorwidth=0.254 reliefentries=4 polygonreliefangle="90 Angle" airgapwidth=0.254
PolygonConnect Polygon_B.Cu-GND-1_ConnectRelief45 [IsNamedPolygon('B.Cu-GND-1') vs (IsThruPin or IsSMTPin) and (PadShape_AllLayers = 'Round')] p80: connectstyle=Relief reliefconductorwidth=0.5 reliefentries=4 polygonreliefangle="45 Angle" airgapwidth=0.5
PolygonConnect Polygon_B.Cu-GND-1_ConnectRelief90 [IsNamedPolygon('B.Cu-GND-1') vs (IsThruPin or IsSMTPin) and (PadShape_AllLayers <> 'Round')] p81: connectstyle=Relief reliefconductorwidth=0.5 reliefentries=4 polygonreliefangle="90 Angle" airgapwidth=0.5
PolygonConnect Polygon_B.Cu-GND_ConnectDirect [IsNamedPolygon('B.Cu-GND') vs IsVia] p82: connectstyle=Direct reliefconductorwidth=0.254 reliefentries=4 polygonreliefangle="90 Angle" airgapwidth=0.254
PolygonConnect Polygon_B.Cu-GND_ConnectRelief45 [IsNamedPolygon('B.Cu-GND') vs (IsThruPin or IsSMTPin) and (PadShape_AllLayers = 'Round')] p83: connectstyle=Relief reliefconductorwidth=0.5 reliefentries=4 polygonreliefangle="45 Angle" airgapwidth=0.5
PolygonConnect Polygon_B.Cu-GND_ConnectRelief90 [IsNamedPolygon('B.Cu-GND') vs (IsThruPin or IsSMTPin) and (PadShape_AllLayers <> 'Round')] p84: connectstyle=Relief reliefconductorwidth=0.5 reliefentries=4 polygonreliefangle="90 Angle" airgapwidth=0.5
PolygonConnect Polygon_B.Cu-_ConnectDirect [IsNamedPolygon('B.Cu-') vs IsVia] p85: connectstyle=Direct reliefconductorwidth=0.254 reliefentries=4 polygonreliefangle="90 Angle" airgapwidth=0.254
PolygonConnect Polygon_B.Cu-_ConnectRelief45 [IsNamedPolygon('B.Cu-') vs (IsThruPin or IsSMTPin) and (PadShape_AllLayers = 'Round')] p86: connectstyle=Relief reliefconductorwidth=0.5 reliefentries=4 polygonreliefangle="45 Angle" airgapwidth=0.5
PolygonConnect Polygon_B.Cu-_ConnectRelief90 [IsNamedPolygon('B.Cu-') vs (IsThruPin or IsSMTPin) and (PadShape_AllLayers <> 'Round')] p87: connectstyle=Relief reliefconductorwidth=0.5 reliefentries=4 polygonreliefangle="90 Angle" airgapwidth=0.5
PolygonConnect Polygon_F.Cu-GND-9_ConnectDirect [IsNamedPolygon('F.Cu-GND-9') vs IsVia] p88: connectstyle=Direct reliefconductorwidth=0.254 reliefentries=4 polygonreliefangle="90 Angle" airgapwidth=0.254
PolygonConnect Polygon_F.Cu-GND-9_ConnectRelief45 [IsNamedPolygon('F.Cu-GND-9') vs (IsThruPin or IsSMTPin) and (PadShape_AllLayers = 'Round')] p89: connectstyle=Relief reliefconductorwidth=0.5 reliefentries=4 polygonreliefangle="45 Angle" airgapwidth=0.5
PolygonConnect Polygon_F.Cu-GND-9_ConnectRelief90 [IsNamedPolygon('F.Cu-GND-9') vs (IsThruPin or IsSMTPin) and (PadShape_AllLayers <> 'Round')] p90: connectstyle=Relief reliefconductorwidth=0.5 reliefentries=4 polygonreliefangle="90 Angle" airgapwidth=0.5
PolygonConnect Polygon_F.Cu-GND-8_ConnectDirect [IsNamedPolygon('F.Cu-GND-8') vs IsVia] p91: connectstyle=Direct reliefconductorwidth=0.254 reliefentries=4 polygonreliefangle="90 Angle" airgapwidth=0.254
PolygonConnect Polygon_F.Cu-GND-8_ConnectNO [IsThruPin or IsSMTPin] p92: connectstyle=NoConnect reliefconductorwidth=0.254 reliefentries=4 polygonreliefangle="90 Angle" airgapwidth=0.254
PolygonConnect Polygon_F.Cu-GND-7_ConnectDirect [IsNamedPolygon('F.Cu-GND-7') vs IsVia] p93: connectstyle=Direct reliefconductorwidth=0.254 reliefentries=4 polygonreliefangle="90 Angle" airgapwidth=0.254
PolygonConnect Polygon_F.Cu-GND-7_ConnectRelief45 [IsNamedPolygon('F.Cu-GND-7') vs (IsThruPin or IsSMTPin) and (PadShape_AllLayers = 'Round')] p94: connectstyle=Relief reliefconductorwidth=0.5 reliefentries=4 polygonreliefangle="45 Angle" airgapwidth=0.5
PolygonConnect Polygon_F.Cu-GND-7_ConnectRelief90 [IsNamedPolygon('F.Cu-GND-7') vs (IsThruPin or IsSMTPin) and (PadShape_AllLayers <> 'Round')] p95: connectstyle=Relief reliefconductorwidth=0.5 reliefentries=4 polygonreliefangle="90 Angle" airgapwidth=0.5
PolygonConnect Polygon_F.Cu-GND-6_ConnectDirect [IsNamedPolygon('F.Cu-GND-6') vs IsVia] p96: connectstyle=Direct reliefconductorwidth=0.254 reliefentries=4 polygonreliefangle="90 Angle" airgapwidth=0.254
PolygonConnect Polygon_F.Cu-GND-6_ConnectRelief45 [IsNamedPolygon('F.Cu-GND-6') vs (IsThruPin or IsSMTPin) and (PadShape_AllLayers = 'Round')] p97: connectstyle=Relief reliefconductorwidth=0.5 reliefentries=4 polygonreliefangle="45 Angle" airgapwidth=0.5
PolygonConnect Polygon_F.Cu-GND-6_ConnectRelief90 [IsNamedPolygon('F.Cu-GND-6') vs (IsThruPin or IsSMTPin) and (PadShape_AllLayers <> 'Round')] p98: connectstyle=Relief reliefconductorwidth=0.5 reliefentries=4 polygonreliefangle="90 Angle" airgapwidth=0.5
PolygonConnect Polygon_F.Cu-GND-5_ConnectDirect [IsNamedPolygon('F.Cu-GND-5') vs IsVia] p99: connectstyle=Direct reliefconductorwidth=0.254 reliefentries=4 polygonreliefangle="90 Angle" airgapwidth=0.254
PolygonConnect Polygon_F.Cu-GND-5_ConnectRelief45 [IsNamedPolygon('F.Cu-GND-5') vs (IsThruPin or IsSMTPin) and (PadShape_AllLayers = 'Round')] p100: connectstyle=Relief reliefconductorwidth=0.5 reliefentries=4 polygonreliefangle="45 Angle" airgapwidth=0.5
PolygonConnect Polygon_F.Cu-GND-5_ConnectRelief90 [IsNamedPolygon('F.Cu-GND-5') vs (IsThruPin or IsSMTPin) and (PadShape_AllLayers <> 'Round')] p101: connectstyle=Relief reliefconductorwidth=0.5 reliefentries=4 polygonreliefangle="90 Angle" airgapwidth=0.5
PolygonConnect Polygon_F.Cu-GND-4_ConnectDirect [IsNamedPolygon('F.Cu-GND-4') vs IsVia] p102: connectstyle=Direct reliefconductorwidth=0.254 reliefentries=4 polygonreliefangle="90 Angle" airgapwidth=0.254
PolygonConnect Polygon_F.Cu-GND-4_ConnectRelief45 [IsNamedPolygon('F.Cu-GND-4') vs (IsThruPin or IsSMTPin) and (PadShape_AllLayers = 'Round')] p103: connectstyle=Relief reliefconductorwidth=0.5 reliefentries=4 polygonreliefangle="45 Angle" airgapwidth=0.5
PolygonConnect Polygon_F.Cu-GND-4_ConnectRelief90 [IsNamedPolygon('F.Cu-GND-4') vs (IsThruPin or IsSMTPin) and (PadShape_AllLayers <> 'Round')] p104: connectstyle=Relief reliefconductorwidth=0.5 reliefentries=4 polygonreliefangle="90 Angle" airgapwidth=0.5
PolygonConnect Polygon_F.Cu-GND-3_ConnectDirect [IsNamedPolygon('F.Cu-GND-3') vs IsVia] p105: connectstyle=Direct reliefconductorwidth=0.254 reliefentries=4 polygonreliefangle="90 Angle" airgapwidth=0.254
PolygonConnect Polygon_F.Cu-GND-3_ConnectRelief45 [IsNamedPolygon('F.Cu-GND-3') vs (IsThruPin or IsSMTPin) and (PadShape_AllLayers = 'Round')] p106: connectstyle=Relief reliefconductorwidth=0.5 reliefentries=4 polygonreliefangle="45 Angle" airgapwidth=0.5
PolygonConnect Polygon_F.Cu-GND-3_ConnectRelief90 [IsNamedPolygon('F.Cu-GND-3') vs (IsThruPin or IsSMTPin) and (PadShape_AllLayers <> 'Round')] p107: connectstyle=Relief reliefconductorwidth=0.5 reliefentries=4 polygonreliefangle="90 Angle" airgapwidth=0.5
PolygonConnect Polygon_F.Cu-GND-2_ConnectDirect [IsNamedPolygon('F.Cu-GND-2') vs IsVia] p108: connectstyle=Direct reliefconductorwidth=0.254 reliefentries=4 polygonreliefangle="90 Angle" airgapwidth=0.254
PolygonConnect Polygon_F.Cu-GND-2_ConnectRelief45 [IsNamedPolygon('F.Cu-GND-2') vs (IsThruPin or IsSMTPin) and (PadShape_AllLayers = 'Round')] p109: connectstyle=Relief reliefconductorwidth=0.5 reliefentries=4 polygonreliefangle="45 Angle" airgapwidth=0.5
PolygonConnect Polygon_F.Cu-GND-2_ConnectRelief90 [IsNamedPolygon('F.Cu-GND-2') vs (IsThruPin or IsSMTPin) and (PadShape_AllLayers <> 'Round')] p110: connectstyle=Relief reliefconductorwidth=0.5 reliefentries=4 polygonreliefangle="90 Angle" airgapwidth=0.5
PolygonConnect Polygon_F.Cu-GND-1_ConnectDirect [IsNamedPolygon('F.Cu-GND-1') vs IsVia] p111: connectstyle=Direct reliefconductorwidth=0.254 reliefentries=4 polygonreliefangle="90 Angle" airgapwidth=0.254
PolygonConnect Polygon_F.Cu-GND-1_ConnectRelief45 [IsNamedPolygon('F.Cu-GND-1') vs (IsThruPin or IsSMTPin) and (PadShape_AllLayers = 'Round')] p112: connectstyle=Relief reliefconductorwidth=0.5 reliefentries=4 polygonreliefangle="45 Angle" airgapwidth=0.5
PolygonConnect Polygon_F.Cu-GND-1_ConnectRelief90 [IsNamedPolygon('F.Cu-GND-1') vs (IsThruPin or IsSMTPin) and (PadShape_AllLayers <> 'Round')] p113: connectstyle=Relief reliefconductorwidth=0.5 reliefentries=4 polygonreliefangle="90 Angle" airgapwidth=0.5
PolygonConnect Polygon_F.Cu-GND_ConnectDirect [IsNamedPolygon('F.Cu-GND') vs IsVia] p114: connectstyle=Direct reliefconductorwidth=0.254 reliefentries=4 polygonreliefangle="90 Angle" airgapwidth=0.254
PolygonConnect Polygon_F.Cu-GND_ConnectNO [IsThruPin or IsSMTPin] p115: connectstyle=NoConnect reliefconductorwidth=0.254 reliefentries=4 polygonreliefangle="90 Angle" airgapwidth=0.254
RoutingVias [All] p1: holewidth=0.711 width=1.27 viastyle="Through Hole" minholewidth=0.711 minwidth=1.27 maxholewidth=0.711 maxwidth=1.27
SilkToSilkClearance [All] p1: silktosilkclearance=0
SilkToSolderMaskClearance [IsPad] p1: minsilkscreentomaskgap=0 clearancetoexposedcopper=TRUE
SolderMaskExpansion [All] p1: expansion=0.102 istentingtop=FALSE
Width [All] p1: maxlimit=10 minlimit=0.254 preferedwidth=0.254 minimp=50.000000 maximp=50.000000 favimp=50.000000
27 further rules are at their usual default settings.

## Components (designator, comment, footprint, x,y, rotation, side; value= is the part's Value field where it differs from the comment)
C1 "Comment" C_0402_1005Metric#1 -50.54,50.61 r0 top value=DNP
C2 "Comment" C_0402_1005Metric#1 -53.04,50.63 r0 top value=150nF
C3 "Comment" C_0402_1005Metric#1 -52.83,48.23 r90 top value=100nF
C4 "Comment" C_0402_1005Metric#1 -46.57,49.57 r0 top value=1nF
C5 "Comment" C_0402_1005Metric#1 -15.78,40.39 r0 top value=150nF
C6 "Comment" C_0402_1005Metric#1 -12.99,49.92 r90 top value=DNP
C7 "Comment" C_0402_1005Metric#1 -14.93,57.65 r90 top value=100nF
C8 "Comment" C_0402_1005Metric#1 8.41,50.66 r90 top value=150nF
C9 "Comment" C_1206_3216Metric#1 11.25,40.65 r0 top value=10uF
C10 "Comment" C_1206_3216Metric#1 -10.84,48.35 r90 top value=DNP
C11 "Comment" C_0603_1608Metric#1 7.68,41.98 r90 top value=270nF
C12 "Comment" C_0603_1608Metric#1 4.39,50.645 r90 top value=250nF
C13 "Comment" C_0603_1608Metric#1 11.54,48.53 r90 top value=270nF
C14 "Comment" C_1206_3216Metric#1 11.25,42.9 r0 top value=10uF
C15 "Comment" C_0402_1005Metric#1 9.38,52.2 r90 top value=1nF
C16 "Comment" C_0402_1005Metric#1 8.19,48.55 r90 top value=100pF
C17 "Comment" C_0402_1005Metric#1 -11.5,43.3 r90 top value=150nF
C18 "Comment" C_0603_1608Metric#1 -0.84,50.86 r90 top value=270nF
C19 "Comment" C_0402_1005Metric#1 -9.39,40.76 r90 top value=150nF
C20 "Comment" C_0402_1005Metric#1 2.04,50.8 r90 top value=1.5nF
C21 "Comment" C_0603_1608Metric#1 0.62,50.855 r90 top value=270nF
C22 "Comment" C_0603_1608Metric#1 -2.31,50.88 r90 top value=270nF
C23 "Comment" C_1206_3216Metric#1 -8.54,48.35 r90 top value=10uF
C24 "Comment" C_0402_1005Metric#1 5.59,50.66 r90 top value=DNP
C25 "Comment" C_0603_1608Metric#1 12.81,48.1 r90 top value=270nF
C26 "Comment" C_0402_1005Metric#1 -39.21,27.36 r0 top value=150nF
C27 "Comment" C_0402_1005Metric#1 -46.03,22.3 r0 top value=18pF
C28 "Comment" C_0402_1005Metric#1 -43.45,22.3 r0 top value=18pF
C29 "Comment" C_0402_1005Metric#1 -47.81,30.77 r90 top value=120nF
C30 "Comment" C_1206_3216Metric#1 -17.03,29 r90 top value=10uF
C31 "Comment" C_0402_1005Metric#1 -27.8,32.22 r90 top value=150nF
C32 "Comment" C_0402_1005Metric#1 -20.4,30.88 r90 top value=150nF
C33 "Comment" C_0402_1005Metric#1 -24.37,26.86 r0 top value=150nF
C34 "Comment" C_0402_1005Metric#1 -23.95,35.91 r90 top value=1nF
C35 "Comment" C_0402_1005Metric#1 -15.34,16.16 r90 top value=150nF
C36 "Comment" C_1206_3216Metric#1 -14.86,29 r90 top value=10uF
C37 "Comment" C_0402_1005Metric#1 -22.82,30.88 r90 top value=1nF
C38 "Comment" C_0402_1005Metric#1 -32.77,27.07 r90 top value=1nF
C39 "Comment" C_0402_1005Metric#1 -21.58,30.88 r90 top value=150nF
C40 "Comment" C_0402_1005Metric#1 -22.86,35.91 r90 top value=1nF
C41 "Comment" C_0402_1005Metric#1 -31.47,27.07 r90 top value=120nF
C42 "Comment" C_0402_1005Metric#1 -21.58,33.44 r90 top value=150nF
C43 "Comment" C_0402_1005Metric#1 -25.46,37.26 r90 top value=1nF
C44 "Comment" C_0402_1005Metric#1 -3.1,28.06 r0 top value=5.6nF
C45 "Comment" C_0603_1608Metric#1 -10.14,34.72 r90 top value=270nF
C46 "Comment" C_0603_1608Metric#1 -4.43,25.71 r0 top value=10nF
C47 "Comment" C_1206_3216Metric#1 -5.71,14.48 r0 top value=5.6uF
C48 "Comment" C_0402_1005Metric#1 -12.1,30.11 r0 top value=330nF
C49 "Comment" C_0805_2012Metric#1 -8.71,26.24 r0 top value=2.2uF
C50 "Comment" C_0402_1005Metric#1 -3.1,27.1 r0 top value=DNP
C51 "Comment" C_1206_3216Metric#1 -11.85,26.08 r90 top value=10uF
C52 "Comment" C_0402_1005Metric#1 4.28,28.06 r0 top value=22pF
C53 "Comment" C_0402_1005Metric#1 13.32,33.35 r0 top value=22pF
C54 "Comment" C_0805_2012Metric#1 16.34,13.6 r90 top value=2.7uF
C55 "Comment" C_0402_1005Metric#1 -44.51,-3.66 r0 top value=100nF
C56 "Comment" C_0402_1005Metric#1 -46.02,3.64 r90 top value=100nF
C57 "Comment" C_0603_1608Metric#1 -51.17,-8.62 r0 top value=100nF
C58 "Comment" C_0402_1005Metric#1 -40.71,1.31 r0 top value=100nF
C59 "Comment" C_0603_1608Metric#1 -51.53,3.03 r90 top value=10nF
C60 "Comment" C_0603_1608Metric#1 -43.84,-9.09 r0 top value=100nF
C61 "Comment" C_0402_1005Metric#1 -42.69,-10.43 r0 top value=180nF
C62 "Comment" C_0402_1005Metric#1 -51.58,-3.11 r0 top value=120nF
C63 "Comment" C_0603_1608Metric#1 -47.49,-8.93 r0 top value=100nF
C64 "Comment" C_0402_1005Metric#1 -18.02,-0.87 r90 top value=1nF
C65 "Comment" C_0402_1005Metric#1 -27,-12.29 r90 top value=150nF
C66 "Comment" C_0603_1608Metric#1 -12.76,11.85 r90 top value=1uF
C67 "Comment" C_0402_1005Metric#1 -28.25,-12.29 r90 top value=100nF
C68 "Comment" C_0402_1005Metric#1 -22.41,1.93 r90 top value=100nF
C69 "Comment" C_0402_1005Metric#1 -18.11,7.01 r90 top value=1nF
C70 "Comment" C_0402_1005Metric#1 -20.01,1.69 r0 top value=100nF
C71 "Comment" C_0402_1005Metric#1 8.85,-10.57 r0 top value=1nF
C72 "Comment" C_0402_1005Metric#1 7.18,-0.39 r90 top value=100nF
C73 "Comment" C_0402_1005Metric#1 0.21,12.27 r0 top value=120nF
C74 "Comment" C_0402_1005Metric#1 9.22,-9.06 r0 top value=180nF
C75 "Comment" C_0402_1005Metric#1 4.03,12.27 r0 top value=100nF
C76 "Comment" C_0402_1005Metric#1 8.66,10.03 r90 top value=100nF
C77 "Comment" C_0402_1005Metric#1 0.21,11.2 r0 top value=1nF
C78 "Comment" C_0402_1005Metric#1 8.89,-12.09 r0 top value=1nF
C79 "Comment" C_0603_1608Metric#1 7.54,10.01 r90 top value=1uF
C80 "Comment" C_0603_1608Metric#1 12.08,11.89 r0 top value=1uF
C81 "Comment" C_0402_1005Metric#1 4.03,11.2 r0 top value=1nF
C82 "Comment" C_0402_1005Metric#1 9.83,10.03 r90 top value=100nF
C83 "Comment" C_0402_1005Metric#1 23.41,6.89 r90 top value=100nF
C84 "Comment" C_0402_1005Metric#1 32.08,1.07 r90 top value=100nF